# Altium PCB PCB.PcbDoc (part 1 of 2)
Units mm, origin at the board's own origin, x right, y up, seen from the top; angles counter-clockwise.
Board outline 100 x 110 mm, 6 copper layers (Top Layer, Inner Layer 2 (GND), Layer 3, Layer 4, Inner Layer 5 (GND), Bottom Layer 6), stack 1.597 mm thick; 88 components, 67 nets, 500 pads, 417 vias.
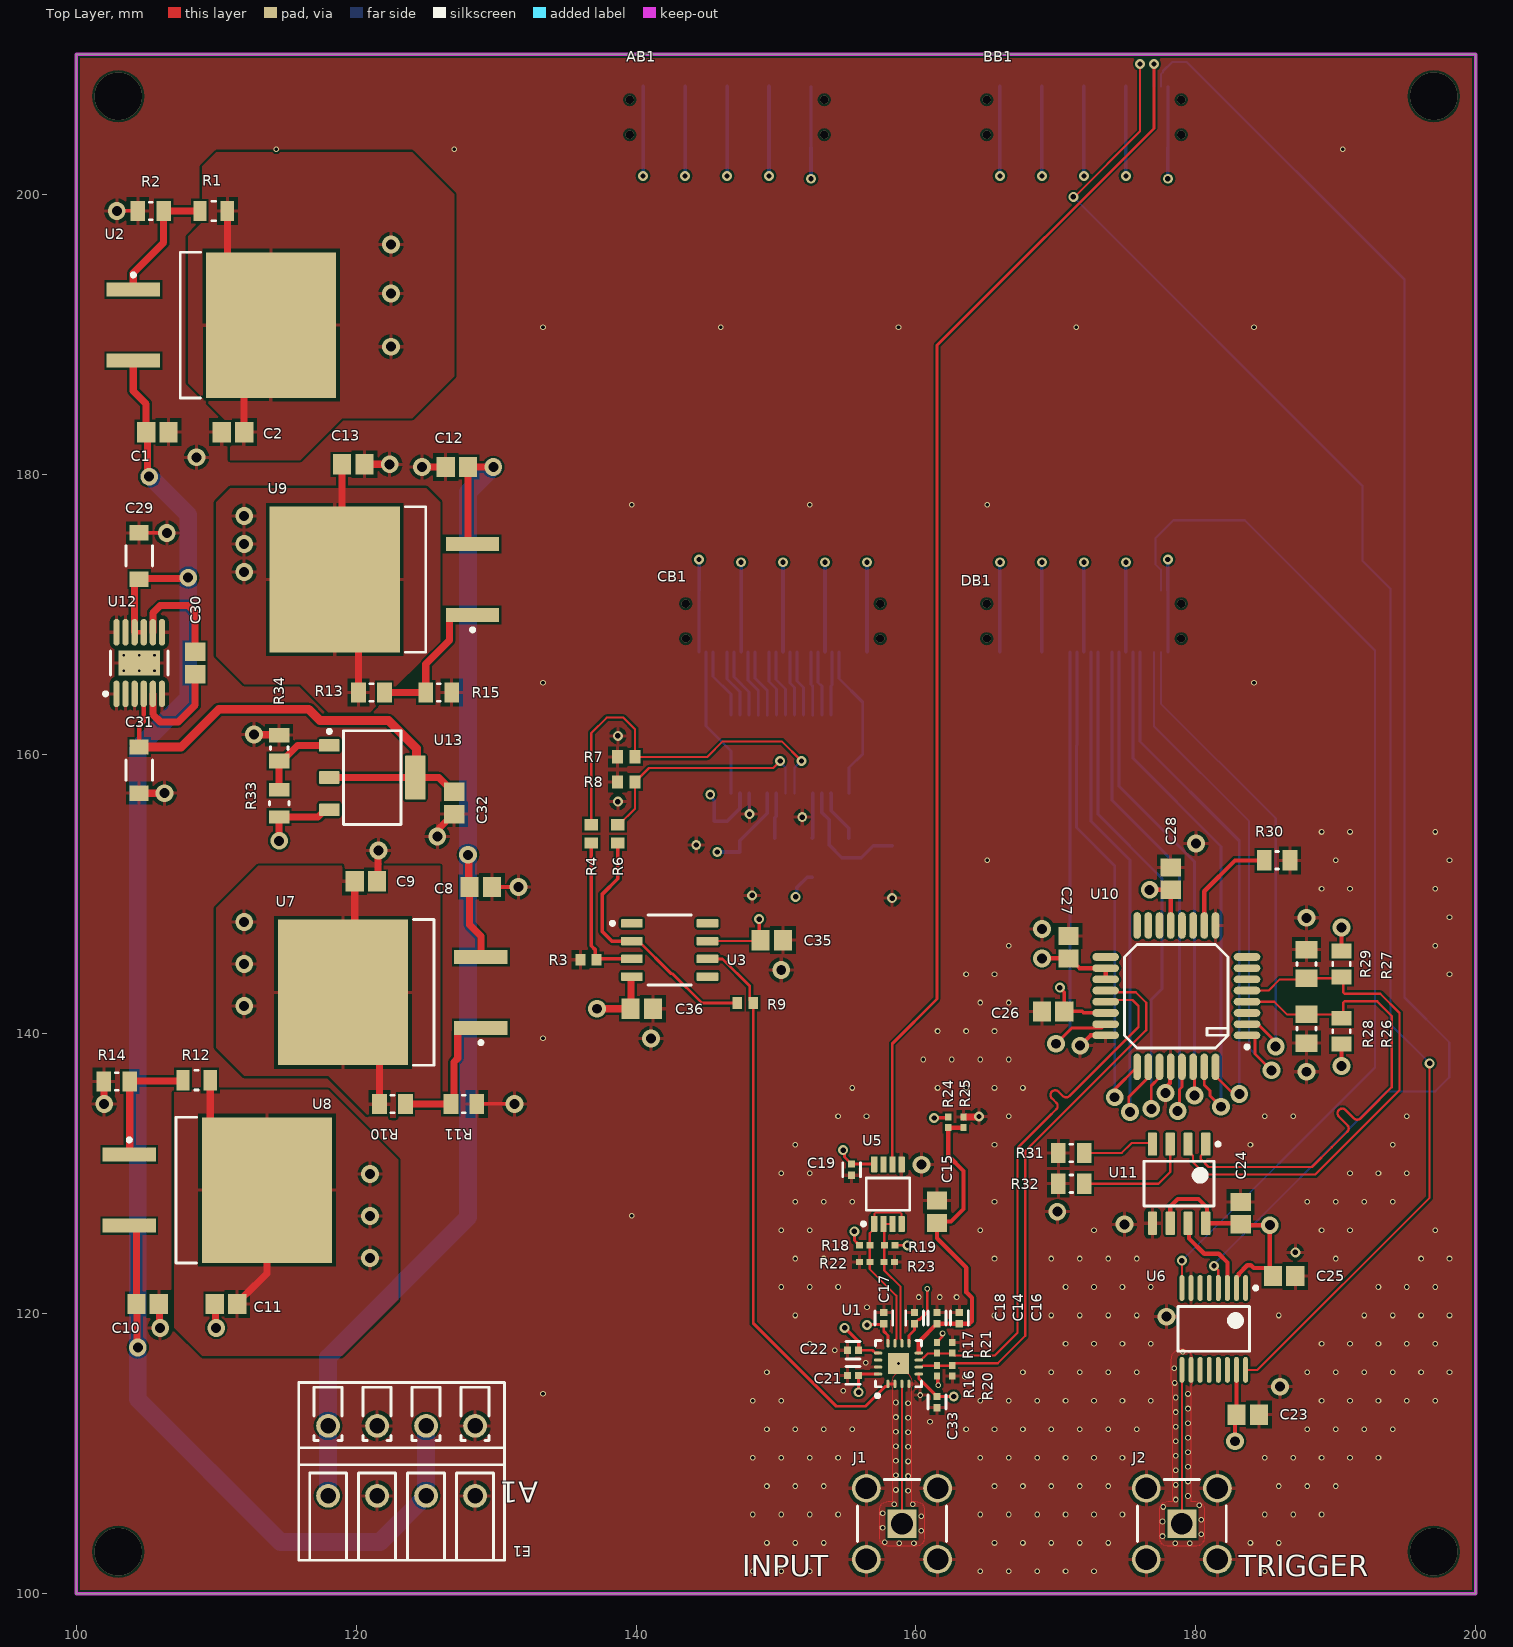
[diagram p0: Top Layer view]
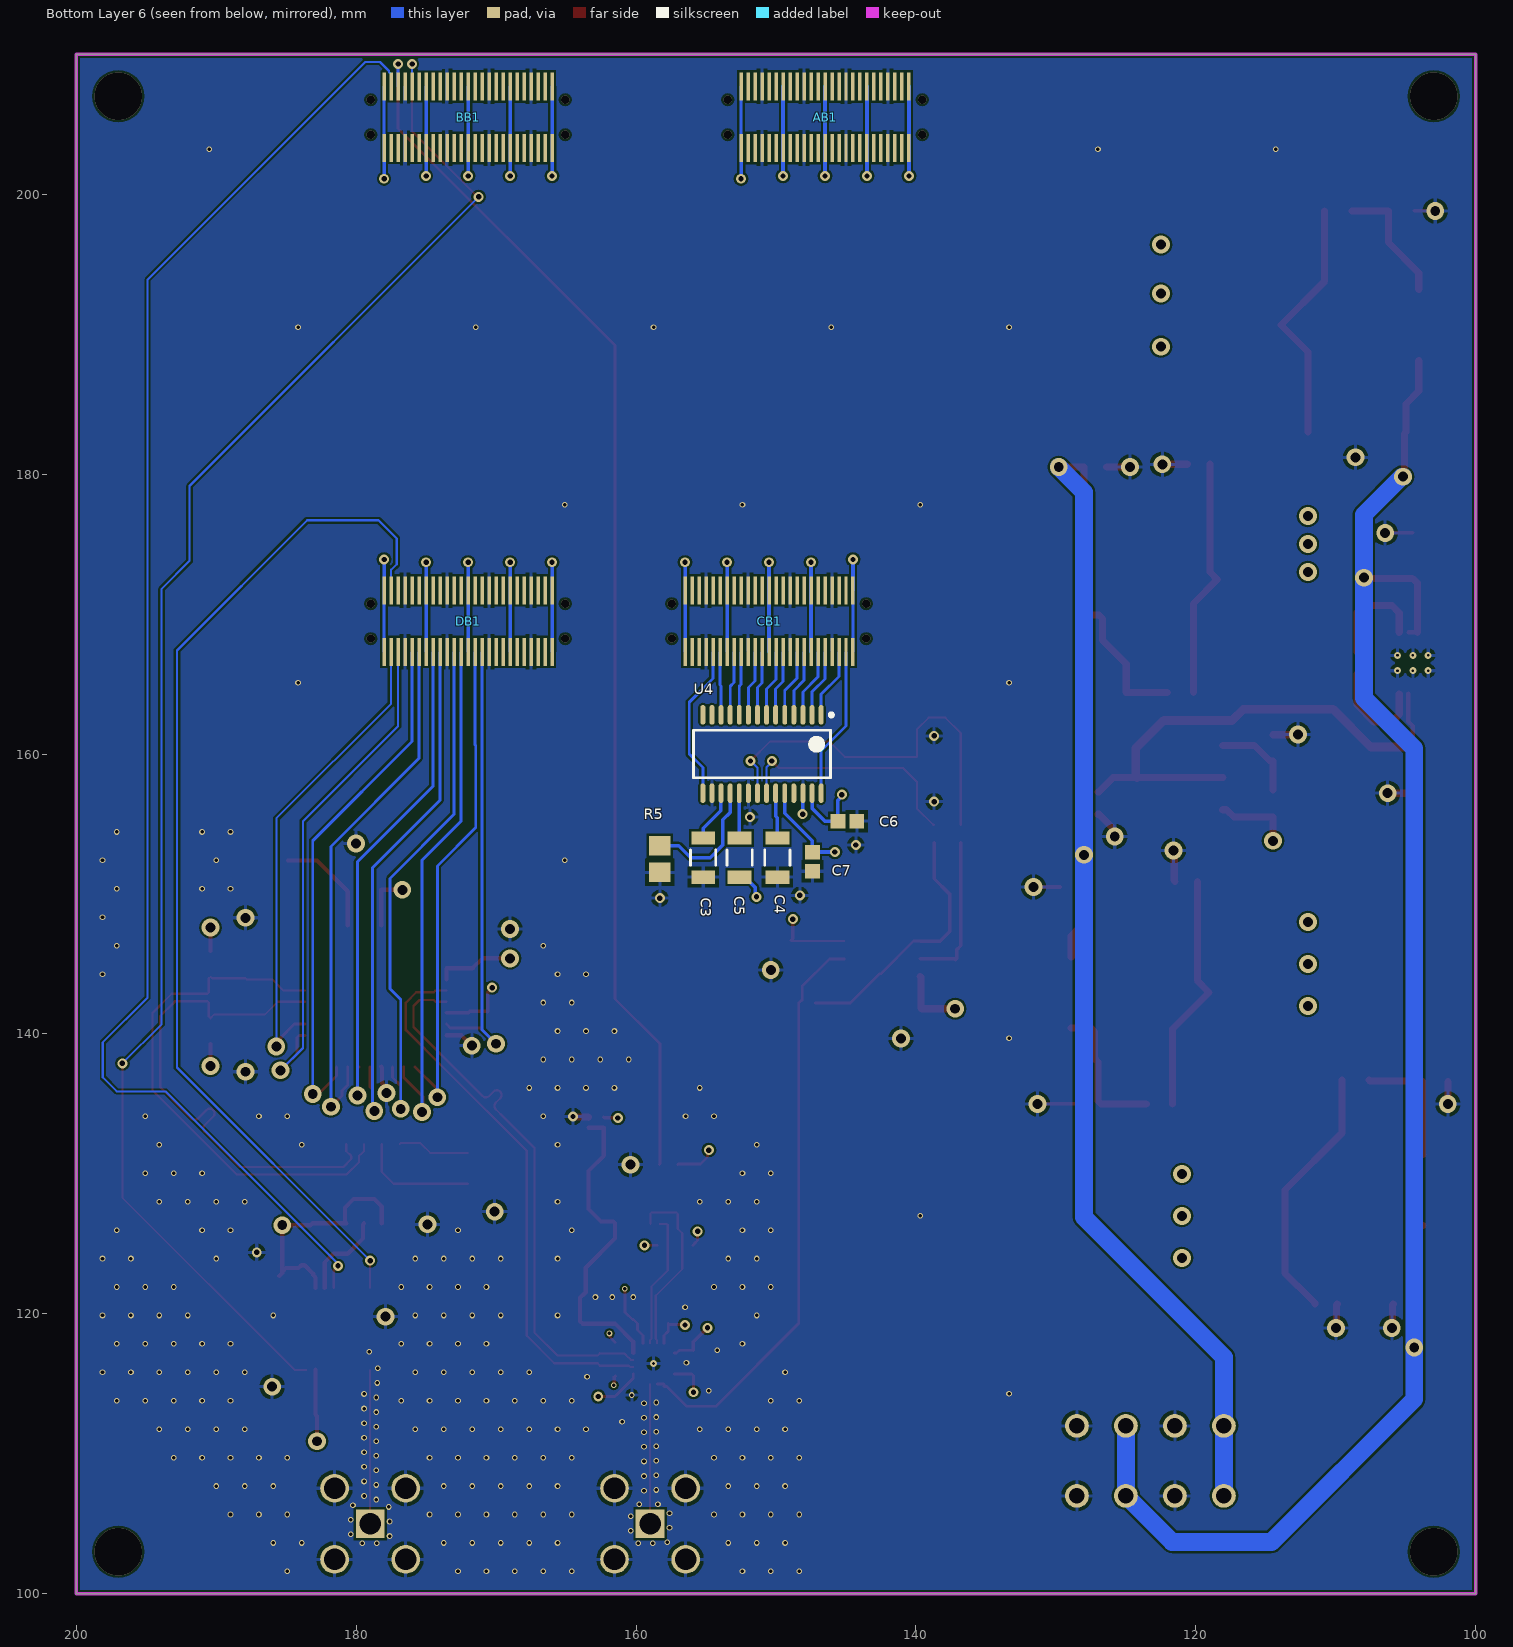
[diagram p1: Bottom Layer 6 view, seen from below]
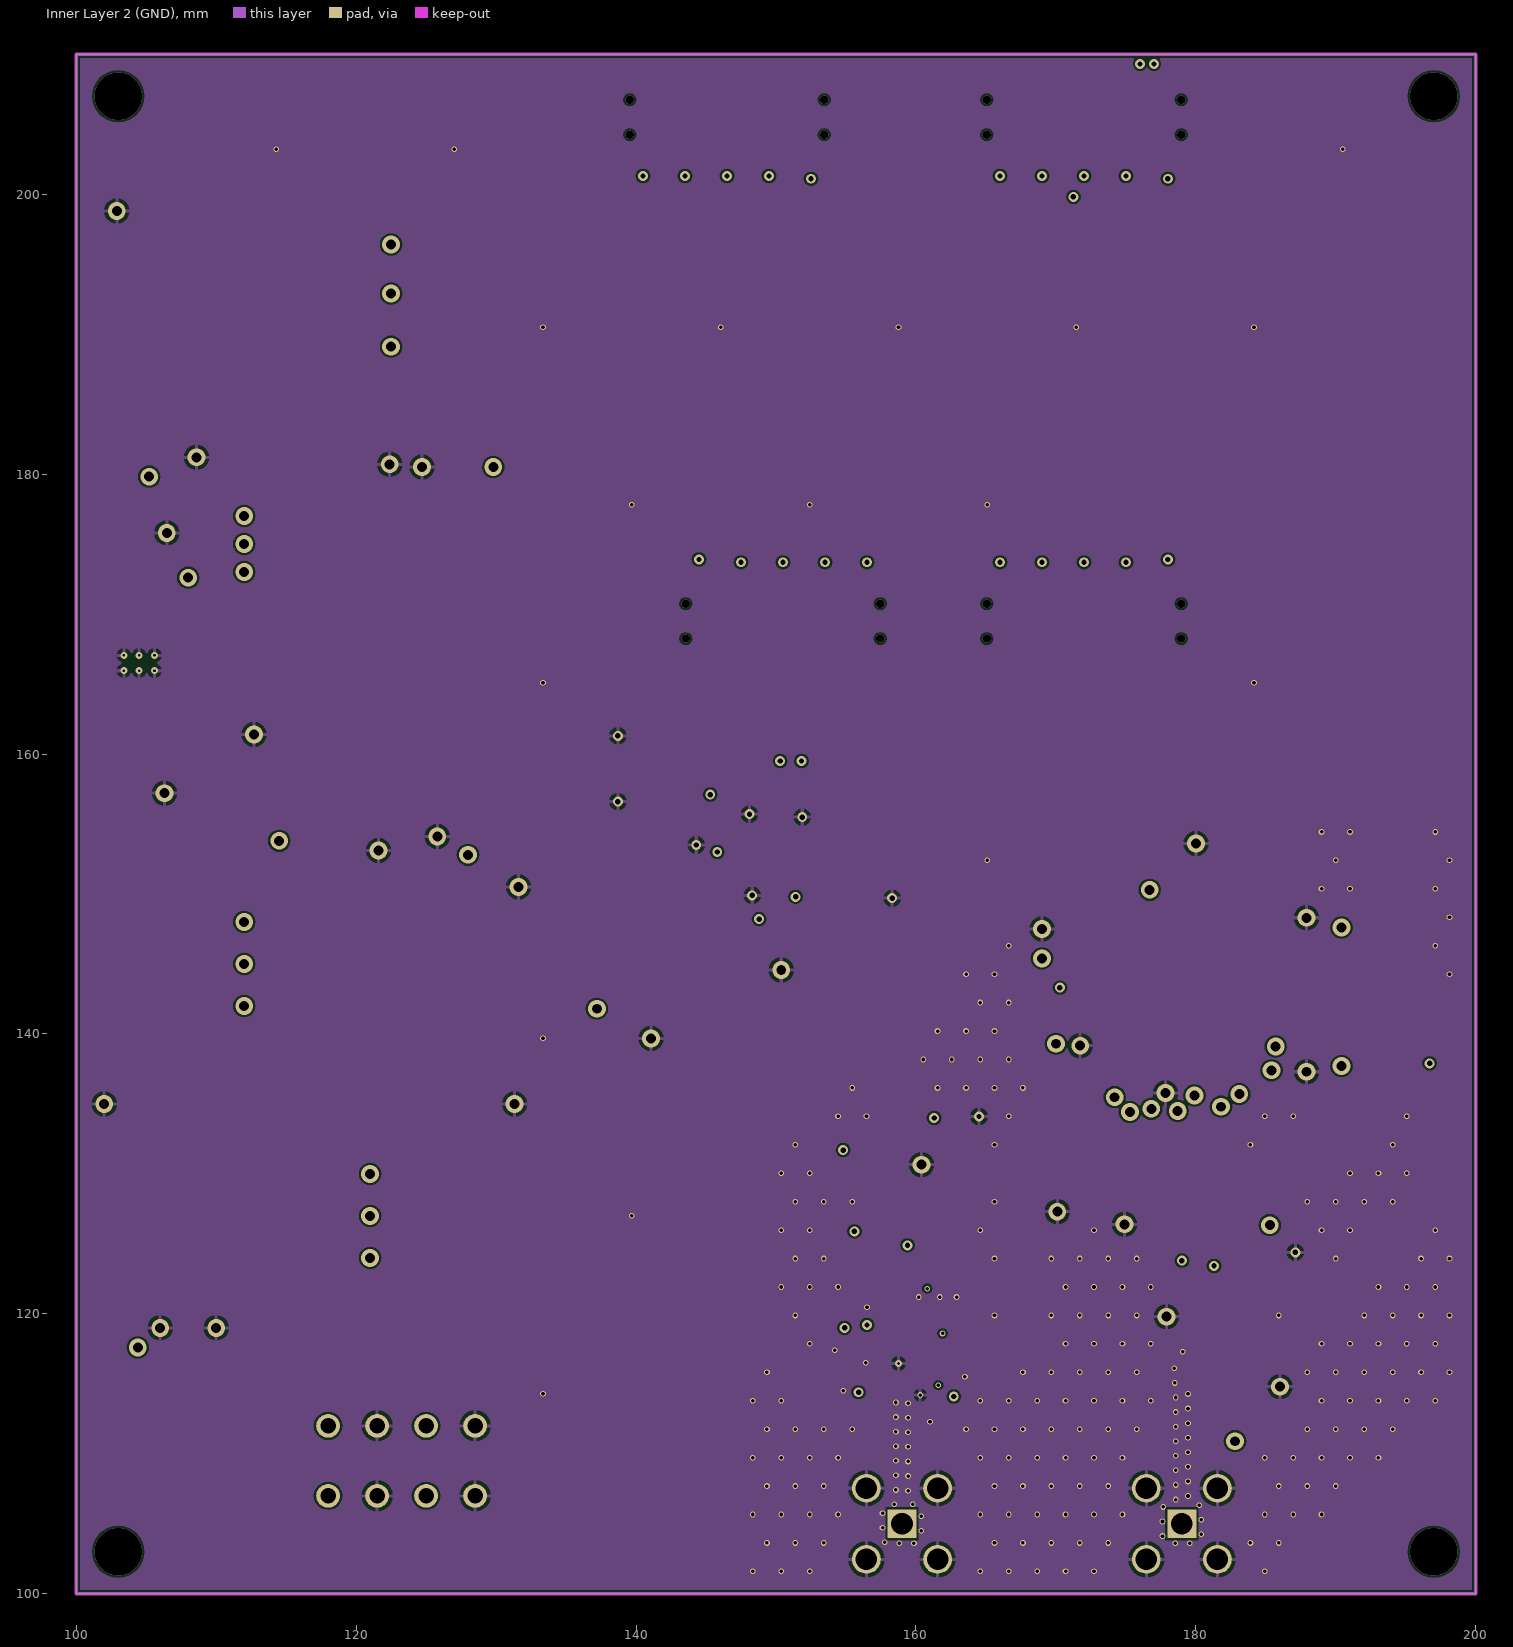
[diagram p2: Inner Layer 2 (GND)]
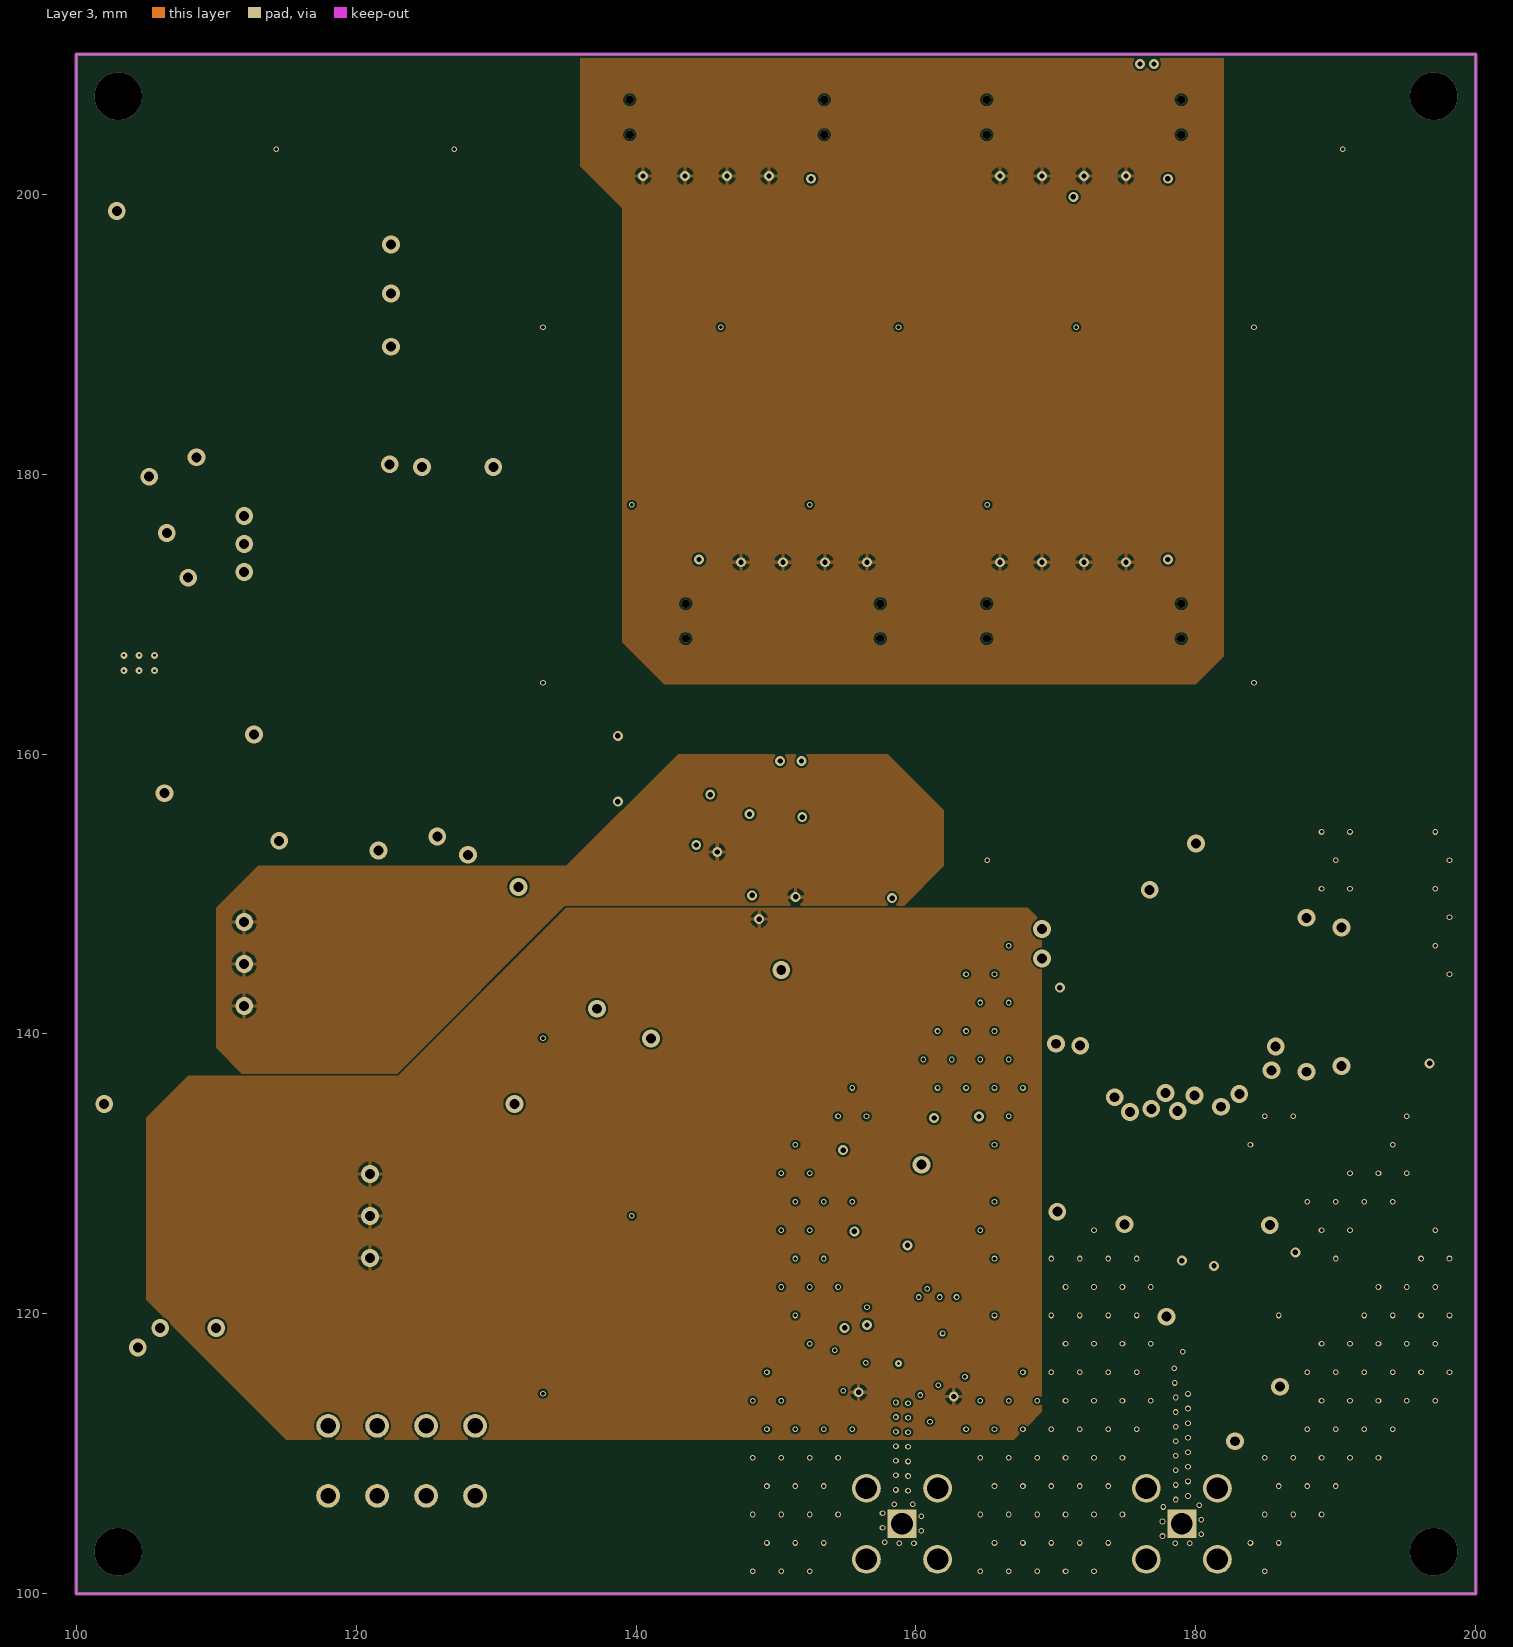
[diagram p3: Layer 3]
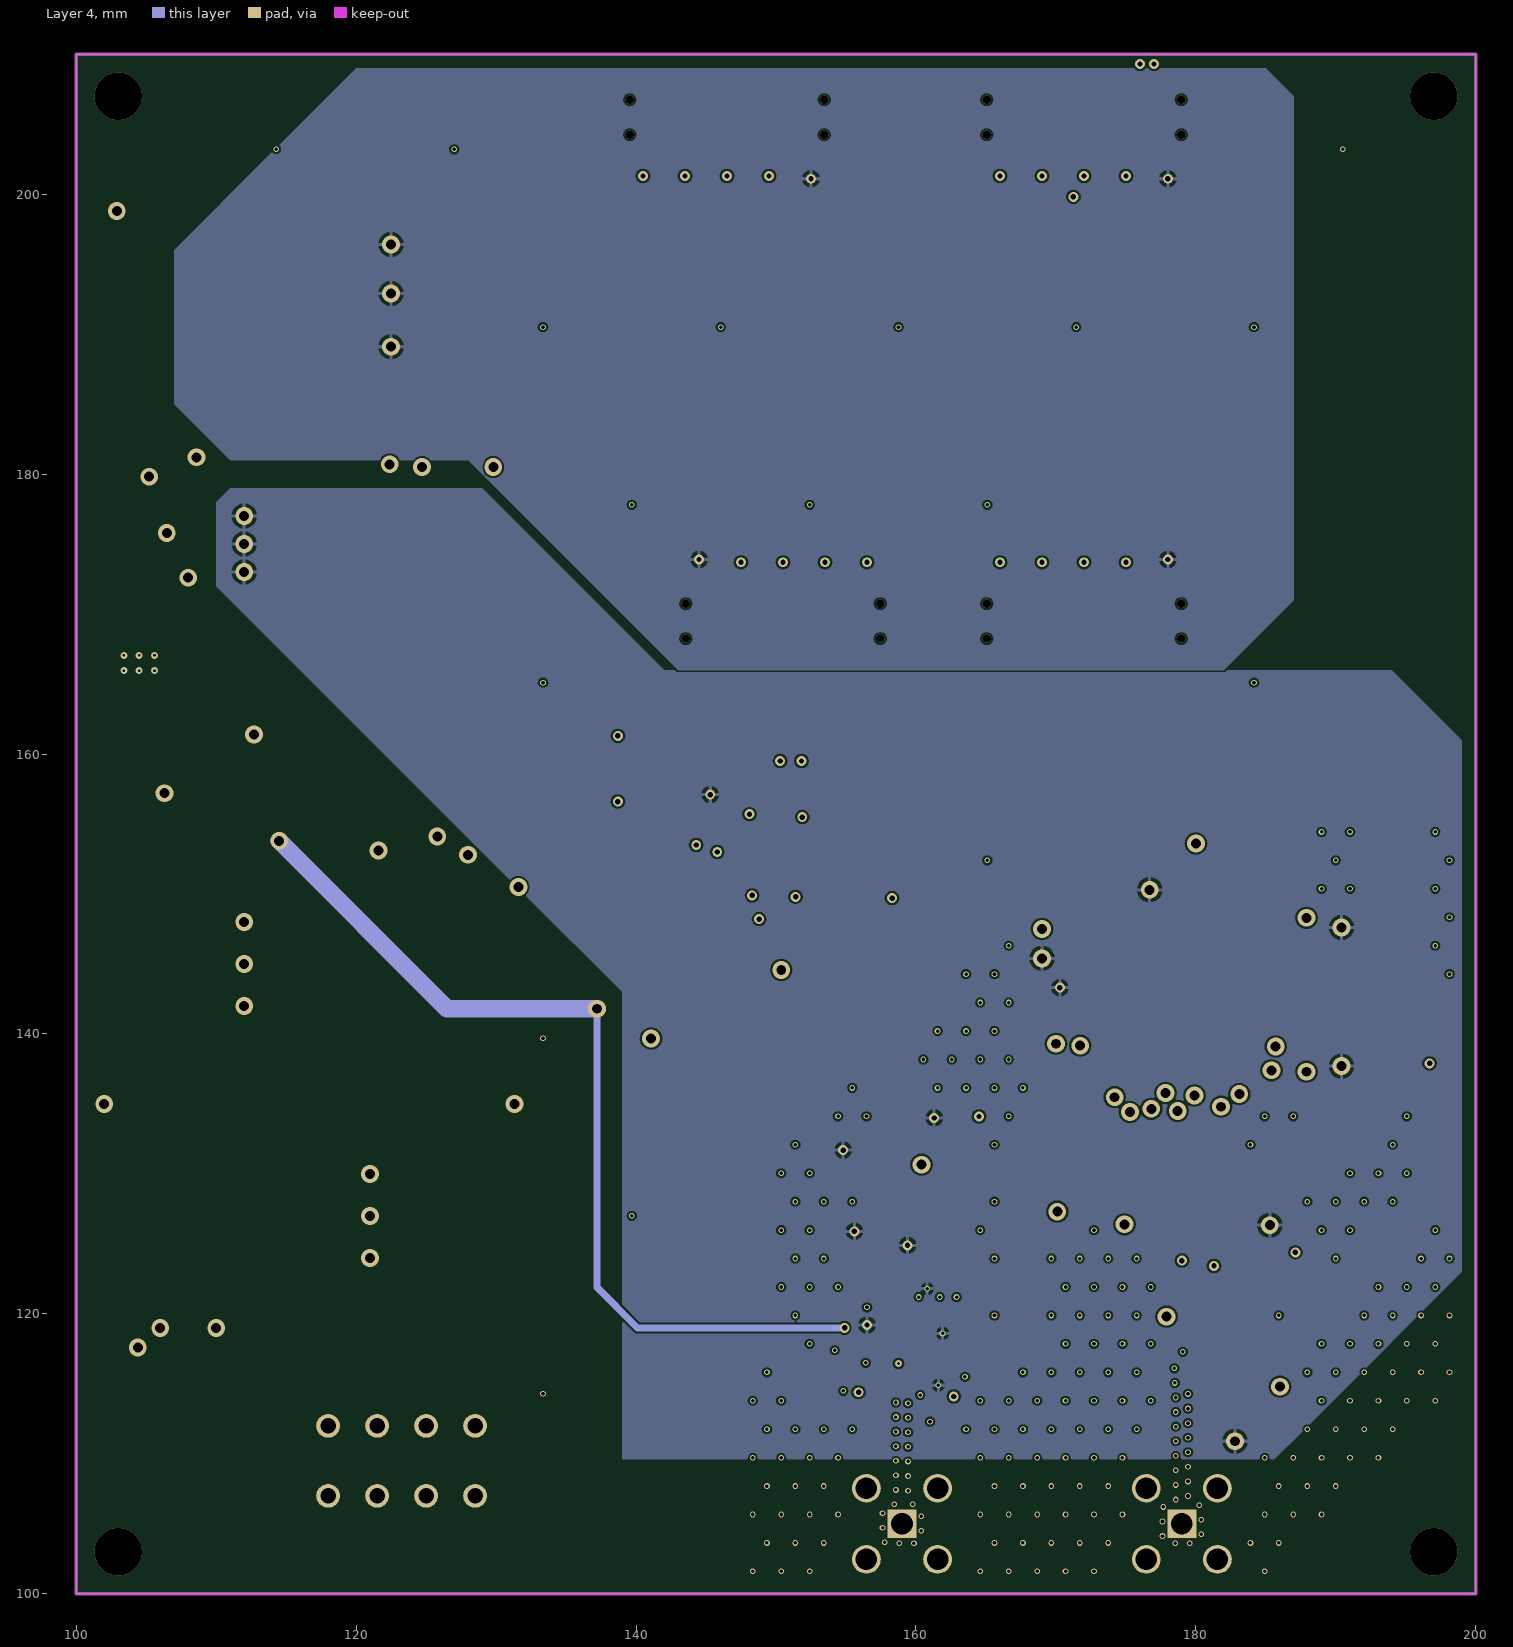
[diagram p4: Layer 4]
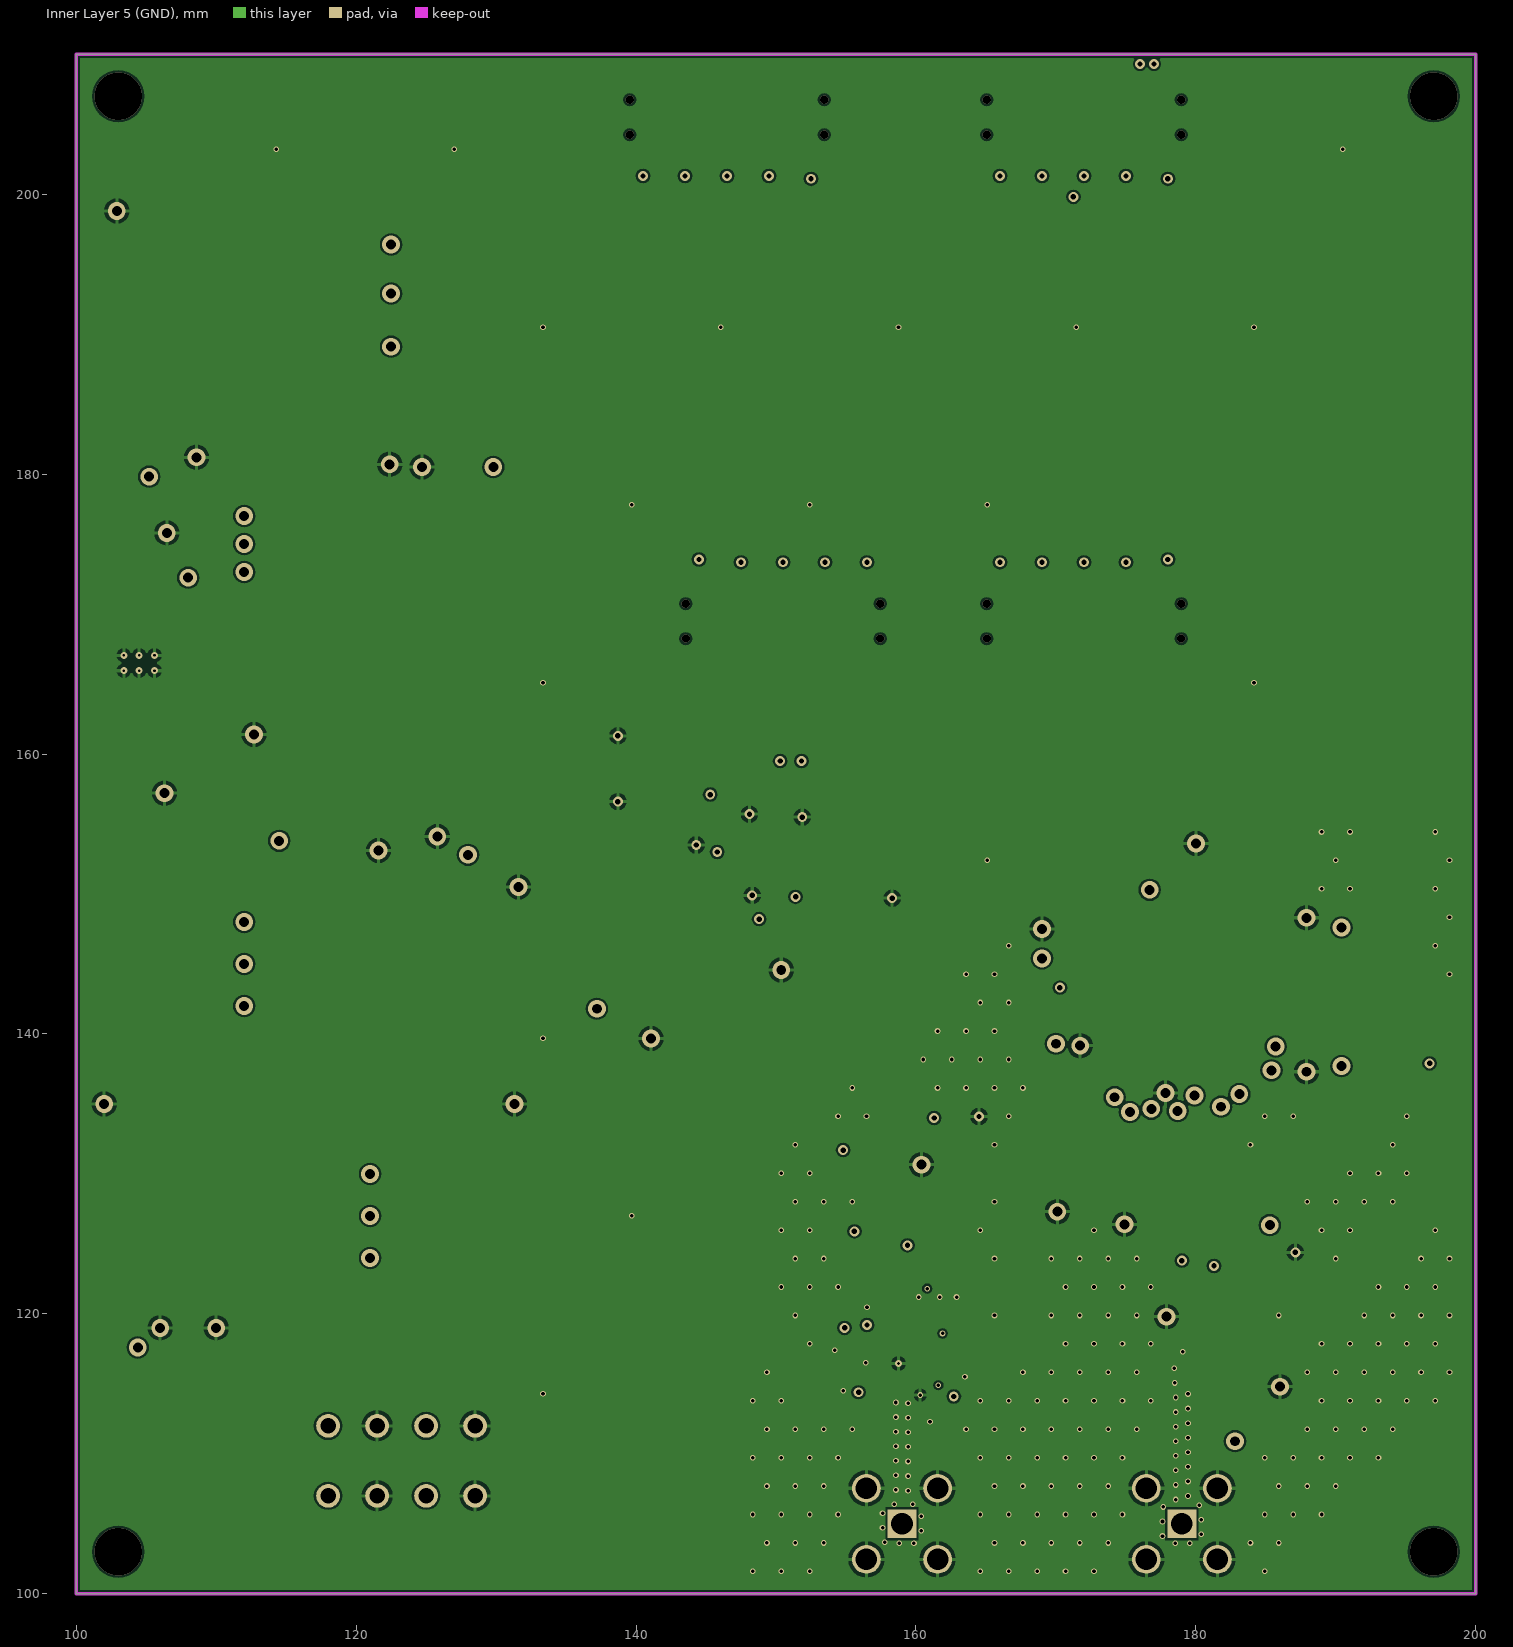
[diagram p5: Inner Layer 5 (GND)]
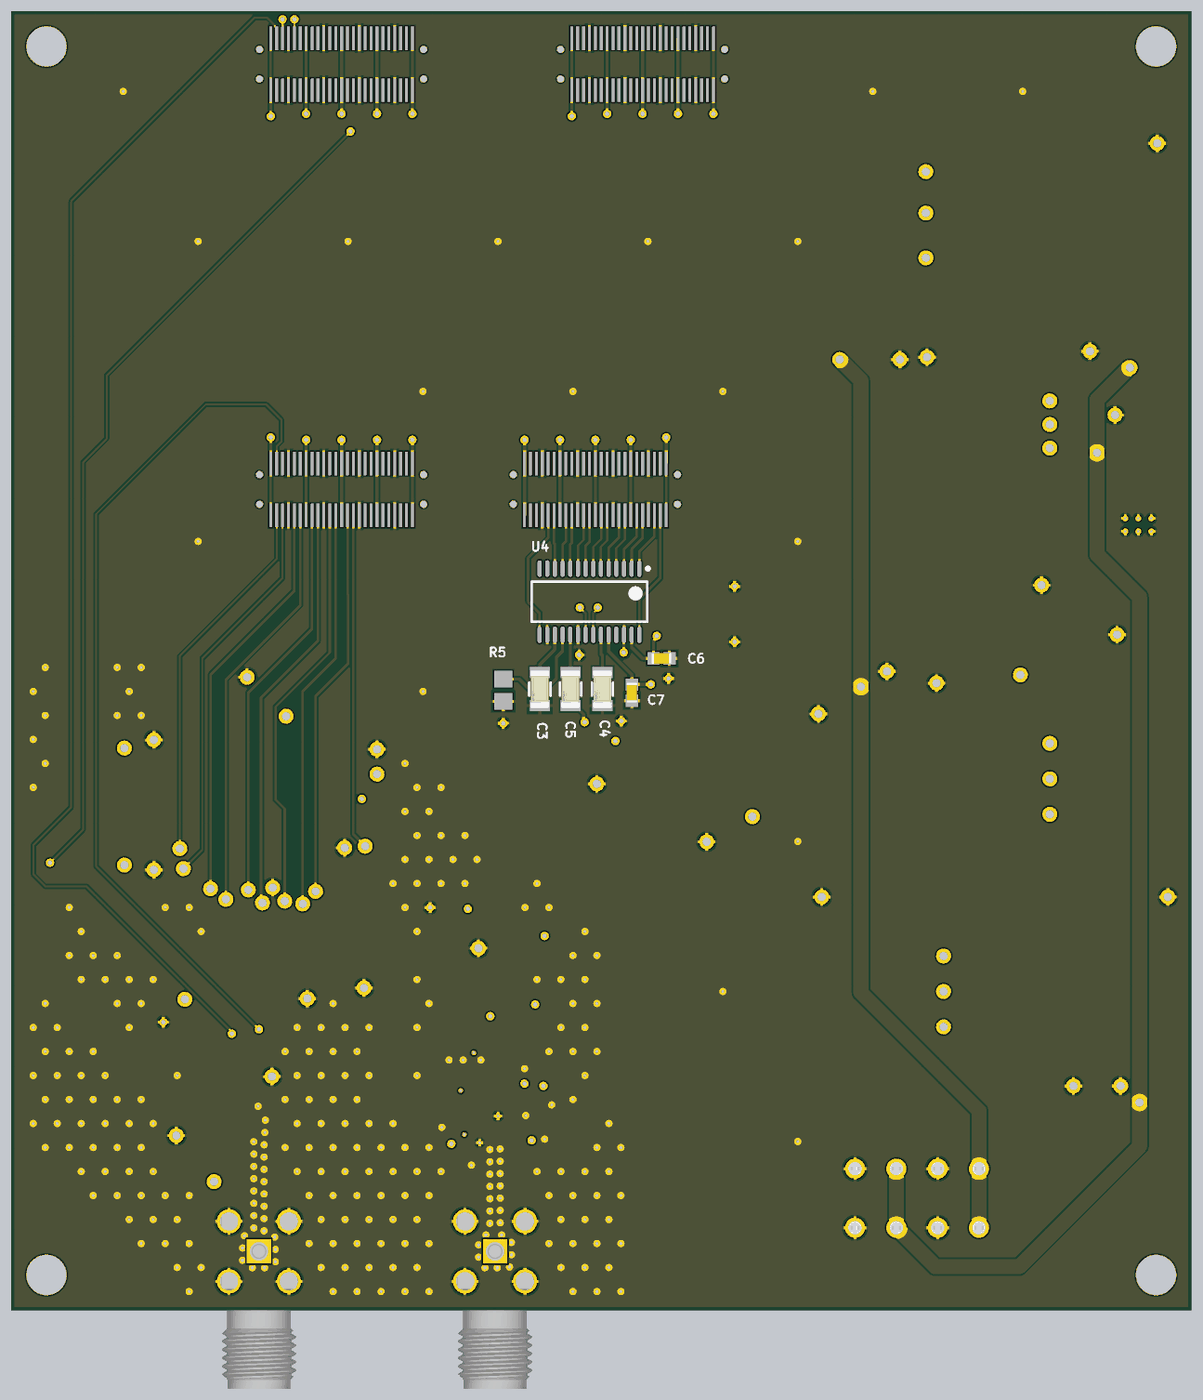
[diagram p7: 3D render of the assembled board from below, using the file's embedded part models]

## Layer stack, top to bottom
Top Solder: solder mask 0.0254, SM-001, Dk 4
Top Layer: signal copper 0.035
Dielectric 1: prepreg 0.1, PP-017, Dk 4.05
Inner Layer 2 (GND): signal copper 0.0175
Dielectric 6: core 0.565, Core-009, Dk 4.05
Layer 3: signal copper 0.0175
Dielectric 3: core 0.127, Core-039, Dk 4.05
Layer 4: signal copper 0.0175
Dielectric 7: core 0.565, Core-009, Dk 4.05
Inner Layer 5 (GND): signal copper 0.0175
Dielectric 5: prepreg 0.1, PP-017, Dk 4.05
Bottom Layer 6: signal copper 0.035
Bottom Solder: solder mask 0.0254, SM-001, Dk 4

## Board outline
100,100 200,100 200,210 100,210

## Design rules (kind name [scope] priority, off if disabled: settings)
Clearance [All] p1: gap=0.152 ignorepadtopadclearanceinfootprint=FALSE
DiffPairsRouting [All] p1: maxlimit=0.381 minlimit=0.381 mostfreqgap=0.381 toplayer_minwidth=0.164 toplayer_maxwidth=0.164 toplayer_prefwidth=0.164 midlayer1_minwidth=0.116 midlayer1_maxwidth=0.116 midlayer1_prefwidth=0.116 midlayer2_minwidth=0.116 midlayer2_maxwidth=0.116 midlayer2_prefwidth=0.116 midlayer3_minwidth=0.14 midlayer3_maxwidth=0.14 midlayer3_prefwidth=0.14 midlayer4_minwidth=0.14 midlayer4_maxwidth=0.14 midlayer4_prefwidth=0.14 bottomlayer_minwidth=0.164 bottomlayer_maxwidth=0.164 bottomlayer_prefwidth=0.164 impedanceprofiledriven=TRUE impedanceprofileid={3BFFB8C7-4477-42D9-B447-678A1F2A0C18} impedanceprofilevalue=100.000000 maxuncoupledlength=12.7
HoleSize [All] p1: absolutevalues=TRUE maxlimit=6.35 minlimit=0.025 maxpercent=80.000 minpercent=20.000
MatchedLengths [InDifferentialPairClass('All Differential Pairs')] p1: tolerance=0.254 checknetsindiffpair=TRUE checkdiffpairvsdiffpair=FALSE checkxsignals=FALSE checkothers=FALSE
MinimumSolderMaskSliver [All] p1 off: minsoldermaskwidth=0.127
PolygonConnect [All] p1: connectstyle=Relief reliefconductorwidth=0.254 reliefentries=4 polygonreliefangle="90 Angle" airgapwidth=0.254
RoomDefinition TR [InComponentClass('TR')] p1 off: confinementstyle=ConfineIn formatcopy=TRUE lockcomponents=FALSE outline 198.5,112 198.5,157 172,157 172,112
RoomDefinition IN [InComponentClass('IN')] p2 off: confinementstyle=ConfineIn formatcopy=TRUE lockcomponents=FALSE outline 139,111.4 164.5,111.4 164.5,128.5 139,128.5
RoomDefinition PW [InComponentClass('PW')] p3 off: confinementstyle=ConfineIn formatcopy=TRUE lockcomponents=FALSE outline 101.5,119.7 132,119.7 132,200.6 101.5,200.6
RoomDefinition FP [InComponentClass('FP')] p4 off: confinementstyle=ConfineIn formatcopy=TRUE lockcomponents=FALSE outline 135,164.5 192.5,164.5 192.5,210 135,210
RoomDefinition CV [InComponentClass('CV')] p5 off: confinementstyle=ConfineIn formatcopy=TRUE lockcomponents=FALSE outline 133.902,130 171,130 171,163.81 133.902,163.81
RoutingVias [All] p1: holewidth=0.711 width=1.27 viastyle="Through Hole" minholewidth=0.203 minwidth=0.381 maxholewidth=2.54 maxwidth=3.81
SilkToSilkClearance [All] p1: silktosilkclearance=0.102
SilkToSolderMaskClearance [IsPad] p1: minsilkscreentomaskgap=0.102 clearancetoexposedcopper=TRUE
SolderMaskExpansion [All] p1: expansion=0.102 istentingtop=FALSE
Width "Width SC50" [InNetClass('SC50')] p1: maxlimit=0.14 minlimit=0.116 preferedwidth=0.14 toplayer_minwidth=0.132 toplayer_maxwidth=0.132 toplayer_prefwidth=0.132 midlayer1_maxwidth=0.116 midlayer1_prefwidth=0.116 midlayer2_maxwidth=0.116 midlayer2_prefwidth=0.116 midlayer3_minwidth=0.14 midlayer4_minwidth=0.14 bottomlayer_minwidth=0.132 bottomlayer_maxwidth=0.132 bottomlayer_prefwidth=0.132 impedanceprofiledriven=TRUE impedanceprofileid={77652154-0B8B-401F-A88F-FA008ABDF14B} impedanceprofilevalue=50.000000 minimp=50.000000 maximp=50.000000 favimp=50.000000
Width "Width Diff50" [InNetClass('S50')] p2: maxlimit=0.17 minlimit=0.133 preferedwidth=0.17 toplayer_minwidth=0.158 toplayer_maxwidth=0.158 toplayer_prefwidth=0.158 midlayer1_maxwidth=0.133 midlayer1_prefwidth=0.133 midlayer2_maxwidth=0.133 midlayer2_prefwidth=0.133 midlayer3_minwidth=0.17 midlayer4_minwidth=0.17 bottomlayer_minwidth=0.158 bottomlayer_maxwidth=0.158 bottomlayer_prefwidth=0.158 impedanceprofiledriven=TRUE impedanceprofileid={6097593C-2317-40E9-9803-30C48A11CF6E} impedanceprofilevalue=50.000000 minimp=50.000000 maximp=50.000000 favimp=50.000000
Width [All] p3: maxlimit=6.35 minlimit=0.152 preferedwidth=0.254
25 further rules are at their usual default settings.

## Classes and differential pairs
net class S50: Latch-Enable_N Latch-Enable_P TRIGGER_DIFF_N TRIGGER_DIFF_P
net class SC50: NetJ1_1 NetJ2_1
component class TR: C23 C24 C25 C26 C27 C28 R26 R27 R28 R29 R30 R31 R32 U6 U10 U11
component class CN: E1 J1 J2
component class PW: C1 C2 C8 C9 C10 C11 C12 C13 C29 C30 C31 C32 R1 R2 R10 R11 R12 R13 R14 R15 R33 R34 U2 U7 U8 U9 U12 U13
component class IN: C14 C15 C16 C17 C18 C19 C21 C22 C33 R16 R17 R18 R19 R20 R21 R22 R23 R24 R25 U1 U5
component class FP: AB1 BB1 CB1 DB1
component class CV: C3 C4 C5 C6 C7 C35 C36 R3 R4 R5 R6 R7 R8 R9 U3 U4
differential pair TRIGGER_DIFF: +TRIGGER_DIFF_P -TRIGGER_DIFF_N
differential pair Latch-Enable: +Latch-Enable_P -Latch-Enable_N

## Components (designator, comment, footprint, x,y, rotation, side; value= is the part's Value field where it differs from the comment)
AB1 "4UCON 19008" 4UCON_19008 146.5,205.5 r180 top locked
BB1 "4UCON 19008" 4UCON_19008 172,205.5 r180 top locked
C1 "1uF" CAPC2013X100X50NL20T25 105.8,183 r180 top
C2 "1uF" CAPC2013X100X50NL20T25 111.2,183 r0 top
C3 "C1206C104J3GACTU" FP-C1206C-EB-MFG 155.2,152.6 r90 bottom value="0.10 μF"
C4 "C1206C104J3GACTU" FP-C1206C-EB-MFG 149.9,152.6 r90 bottom value="0.10 μF"
C5 "C1206C104J3GACTU" FP-C1206C-EB-MFG 152.6,152.6 r90 bottom value="0.10 μF"
C6 "CC0603KRX7R9BB104" CAPC1608X90X40ML10T20 144.9,155.2 r0 bottom
C7 "CC0603KRX7R9BB104" CAPC1608X90X40ML10T20 147.4,152.3 r90 bottom
C8 "1uF" CAPC2013X100X50NL20T25 128.9,150.5 r180 top
C9 "1uF" CAPC2013X100X50NL20T25 120.7,150.9 r180 top
C10 "1uF" CAPC2013X100X50NL20T25 105.1,120.7 r180 top
C11 "1uF" CAPC2013X100X50NL20T25 110.7,120.7 r0 top
C12 "1uF" CAPC2013X100X50NL20T25 127.2,180.5 r0 top
C13 "1uF" CAPC2013X100X50NL20T25 119.8,180.7 r180 top
C14 "C0402C104K8PACTU" FP-C0402-BB-MFG 161.5,119.7 r90 top value="0.10 μF"
C15 "1uF" CAPC2013X100X50NL20T25 161.5,127.3 r270 top
C16 "C0402C104K8PACTU" FP-C0402-BB-MFG 163.1,119.7 r90 top value="0.10 μF"
C17 "C0402C104K8PACTU" FP-C0402-BB-MFG 157.7,119.7 r90 top value="0.10 μF"
C18 "C0402C104K8PACTU" FP-C0402-BB-MFG 159.9,119.7 r90 top value="0.10 μF"
C19 "C0402C104K8PACTU" FP-C0402-BB-MFG 155.4,130.3 r270 top value="0.10 μF"
C21 "C0402C104K8PACTU" FP-C0402-BB-MFG 155.5,115.6 r180 top value="0.10 μF"
C22 "C0402C104K8PACTU" FP-C0402-BB-MFG 155.5,117.4 r0 top value="0.10 μF"
C23 "C0805C104K5RACTU" CAPC2013X88X50NL20T25 183.7,112.8 r180 top value=100n
C24 "C0805C104K5RACTU" CAPC2013X88X50NL20T25 183.2,127.2 r270 top value=100n
C25 "C0805C104K5RACTU" CAPC2013X88X50NL20T25 186.3,122.7 r180 top value=100n
C26 "C0805C104K5RACTU" CAPC2013X88X50NL20T25 169.8,141.6 r0 top value=100n
C27 "C0805C104K5RACTU" CAPC2013X88X50NL20T25 170.9,146.2 r270 top value=100n
C28 "C0805C104K5RACTU" CAPC2013X88X50NL20T25 178.2,151.1 r270 top value=100n
C29 "CGA5L1X7R1E106K160AC" FP-CGA5L-0_3-0_1-MFG 104.5,174.15 r90 top
C30 "1uF" CAPC2013X100X50NL20T25 108.5,166.5 r90 top
C31 "CGA5L1X7R1E106K160AC" FP-CGA5L-0_3-0_1-MFG 104.5,158.85 r270 top
C32 "1uF" CAPC2013X100X50NL20T25 127,156.5 r90 top
C33 "C0402C104K8PACTU" FP-C0402-BB-MFG 161.5,113.7 r270 top value="0.10 μF"
C35 "C0805C104K5RACTU" CAPC2013X88X50NL20T25 149.7,146.7 r180 top value=100n
C36 "C0805C104K5RACTU" CAPC2013X88X50NL20T25 140.4,141.8 r180 top value=100n
CB1 "4UCON 19008" 4UCON_19008 150.5,169.5 r0 top locked
DB1 "4UCON 19008" 4UCON_19008 172,169.5 r180 top locked
E1 "1885200000" LSF_SMT_3_5_135_04 123.25,108.75 r180 top
J1 "INPUT" MOLX-731000114_V 159,105 r90 top locked
J2 "TRIGGER" MOLX-731000114_V 179,105 r90 top locked
R1 "CRCW080530K0FKEA" FP-CRCW0805-e3-MFG 109.825,198.8 r180 top
R2 "CRCW080510K0FKEA" RESC2013X50X30NL20T20 105.325,198.8 r180 top
R3 "20k" RESC1609X50X30LL10T20 136.6,145.3 r180 top
R4 "10k" RESC1609X50X30NL8T20 136.8,154.3 r270 top
R5 "ERA6AEB202V" RESC2013X60X40ML20T25 158.3,152.5 r270 bottom
R6 "10k" RESC1609X50X30NL8T20 138.7,154.3 r270 top
R7 "CRCW060350R0FKEA" RESC1609X50X30NL10T20 139.3,159.8 r0 top
R8 "CRCW060350R0FKEA" RESC1609X50X30NL10T20 139.3,158 r0 top
R9 "20k" RESC1609X50X30LL10T20 147.8,142.2 r0 top
R10 "CRCW080518K0FKEA" RESC2013X50X30NL20T20 122.6,135 r180 top
R11 "CRCW080511K0FKEA" RESC2013X50X30NL20T20 127.7,135 r180 top
R12 "CRCW080530K0FKEA" FP-CRCW0805-e3-MFG 108.6,136.7 r180 top
R13 "CRCW080518K0FKEA" RESC2013X50X30NL20T20 121.1,164.4 r180 top
R14 "CRCW080510K0FKEA" RESC2013X50X30NL20T20 102.9,136.6 r180 top
R15 "CRCW080511K0FKEA" RESC2013X50X30NL20T20 125.9,164.4 r180 top
R16 "RC0402FR-07127RL" RESC1005X40X25LL05T10 161.498,115.923 r270 top value=127R
R17 "RC0402FR-07127RL" RESC1005X40X25LL05T10 161.5,117.575 r90 top value=127R
R18 "RC0402FR-07127RL" RESC1005X40X25LL05T10 156.325,124.9 r180 top value=127R
R19 "RC0402FR-07127RL" RESC1005X40X25LL05T10 158.11,124.9 r0 top value=127R
R20 "RC0402FR-0782R5L" RESC1005X40X25LL05T10 162.598,115.923 r90 top value=82R5
R21 "RC0402FR-0782R5L" RESC1005X40X25LL05T10 162.6,117.575 r270 top value=82R5
R22 "RC0402FR-0782R5L" RESC1005X40X25LL05T10 156.325,123.7 r0 top value=82R5
R23 "RC0402FR-0782R5L" RESC1005X40X25LL05T10 158.075,123.7 r180 top value=82R5
R24 "RC0402FR-07127RL" RESC1005X40X25LL05T10 162.3,133.675 r90 top value=127R
R25 "RC0402FR-0782R5L" RESC1005X40X25LL05T10 163.4,133.675 r270 top value=82R5
R26 "127 Ohm" RESC2013X50X30NL20T20 190.4,140.2 r270 top
R27 "127 Ohm" RESC2013X50X30NL20T20 190.4,145 r90 top
R28 "82.5 Ohm" RESC2013X50X30ML20T20 187.9,140.375 r90 top
R29 "82.5 Ohm" RESC2013X50X30ML20T20 187.9,145 r270 top
R30 "2.2k" RESC2013X50X30NL20T20 185.8,152.4 r180 top
R31 "2.2k" RESC2013X50X30NL20T20 171.1,131.5 r180 top
R32 "2.2k" RESC2013X50X30NL20T20 171.1,129.3 r180 top
R33 "CRCW080530K0FKEA" FP-CRCW0805-e3-MFG 114.5,156.475 r90 top
R34 "CRCW080510K0FKEA" RESC2013X50X30NL20T20 114.5,160.425 r90 top
U1 "ADCMP582BCPZ-R2" ADI-CP-16-3_L 158.75,116.45 r90 top locked
U2 "LM317D2T-TR" TO-263_N 110.379,190.644 r0 top
U3 "OPA189IDR" FP-D0008A-MFG 142.4,146 r0 top
U4 "AD9762ARUZ" RU-28_L 151,160 r270 bottom
U5 "SN65EPT23DGKR" DGK0008A_L 158,128.556 r90 top
U6 "Si53360-B-GT" SLAB-TSSOP-16_M 181.275,118.925 r270 top
U7 "LM317D2T-TR" TO-263_N 122.61,142.967 r180 top
U8 "LM317D2T-TR" TO-263_N 110.09,128.844 r0 top
U9 "LM317D2T-TR" TO-263_N 122.021,172.467 r180 top
U10 "Variable Digital Delay" CQFP80P1115X1115X120-32N 178.6,142.7 r180 top
U11 "SN65EPT22D" D0008A_M 178.8,129.3 r270 top
U12 "LTC3261IMSE#PBF" LT-MSE-12-EDP_M 104.5,166.5 r90 top
U13 "LM337IMP/NOPB" DCY0004A_L 121.156,158.32 r0 top

## Footprints (in the part's own frame and the unit in brackets; to place one, negate y for a bottom-side part, rotate by r counter-clockwise, add the part's x,y. Pads: shape width x height; smd on the part's side, far side on the other; paste and mask are expansions set on the pad)
4UCON_19008 [mm]
  rect 0.25x2 smd far side: 1(-6,-2.2) 2(-5.5,-2.2) 3(-5,-2.2) 4(-4.5,-2.2) 5(-4,-2.2) 6(-3.5,-2.2) 7(-3,-2.2) 8(-2.5,-2.2) 9(-2,-2.2) 10(-1.5,-2.2) 11(-1,-2.2) 12(-0.5,-2.2) 13(0,-2.2) 14(0.5,-2.2) 15(1,-2.2) 16(1.5,-2.2) 17(2,-2.2) 18(2.5,-2.2) 19(3,-2.2) 20(3.5,-2.2) 21(4,-2.2) 22(4.5,-2.2) 23(5,-2.2) 24(5.5,-2.2) 25(6,-2.2) 26(6,2.2) 27(5.5,2.2) 28(5,2.2) 29(4.5,2.2) 30(4,2.2) 31(3.5,2.2) 32(3,2.2) 33(2.5,2.2) 34(2,2.2) 35(1.5,2.2) 36(1,2.2) 37(0.5,2.2) 38(0,2.2) 39(-0.5,2.2) 40(-1,2.2) 41(-1.5,2.2) 42(-2,2.2) 43(-2.5,2.2) 44(-3,2.2) 45(-3.5,2.2) 46(-4,2.2) 47(-4.5,2.2) 48(-5,2.2) 49(-5.5,2.2) 50(-6,2.2)
ADI-CP-16-3_L [mm] "QFN, 16-Leads, Body 3x3mm, Pitch 0.5mm, Thermal Pad 1.5x1.5mm, IPC High Density"
  oval 0.6x0.2 smd: 1(-1.45,0.75) 2(-1.45,0.25) 3(-1.45,-0.25) 4(-1.45,-0.75) 9(1.45,-0.75) 10(1.45,-0.25) 11(1.45,0.25) 12(1.45,0.75)
  oval 0.2x0.6 smd: 5(-0.75,-1.45) 6(-0.25,-1.45) 7(0.25,-1.45) 8(0.75,-1.45) 13(0.75,1.45) 14(0.25,1.45) 15(-0.25,1.45) 16(-0.75,1.45)
  rect 1.5x1.5 smd: 17(0,0)
  silkscreen extent -2.42,-1.65 1.65,1.65, body extent -1.5,-1.5 1.5,1.5, height 0.9
CAPC1608X90X40ML10T20 [mm] "Chip Capacitor, 2-Leads, Body 1.7x0.9mm, IPC Low Density"
  rect 1.05x1.05 smd: 1(-0.675,0) 2(0.675,0)
  body extent -0.85,-0.45 0.85,0.45, height 0.9
CAPC2013X88X50NL20T25 [mm] "Chip Capacitor, 2-Leads, Body 2.00x1.25mm, IPC Medium Density"
  rect 1.3x1.45 smd: 1(-0.8,0) 2(0.8,0)
  body extent -1.1,-0.72 1.1,0.72, height 0.88
CAPC2013X100X50NL20T25 [mm] "Chip Capacitor, 2-Leads, Body 2.00x1.25mm, IPC Medium Density"
  rect 1.3x1.45 smd: 1(-0.8,0) 2(0.8,0)
  body extent -1.1,-0.72 1.1,0.72, height 1
CQFP80P1115X1115X120-32N [mm] "CQFP, 32-Leads, Body 11.15x11.15mm, Pitch 0.80mm, IPC Medium Density"
  oval 1.9x0.55 smd: 1(-5.05,2.8) 2(-5.05,2) 3(-5.05,1.2) 4(-5.05,0.4) 5(-5.05,-0.4) 6(-5.05,-1.2) 7(-5.05,-2) 8(-5.05,-2.8) 17(5.05,-2.8) 18(5.05,-2) 19(5.05,-1.2) 20(5.05,-0.4) 21(5.05,0.4) 22(5.05,1.2) 23(5.05,2) 24(5.05,2.8)
  oval 0.55x1.9 smd: 9(-2.8,-5.05) 10(-2,-5.05) 11(-1.2,-5.05) 12(-0.4,-5.05) 13(0.4,-5.05) 14(1.2,-5.05) 15(2,-5.05) 16(2.8,-5.05) 25(2.8,5.05) 26(2,5.05) 27(1.2,5.05) 28(0.4,5.05) 29(-0.4,5.05) 30(-1.2,5.05) 31(-2,5.05) 32(-2.8,5.05)
  silkscreen extent -5.18,-3.7 3.7,3.75, body extent -5.58,-5.58 5.58,5.58, height 1.1
D0008A_M [mm] "SOIC, 8-Leads, Body 5x4mm, Pitch 1.27mm, IPC Low Density"
  rrect15% 1.65x0.65 smd: 1(-2.825,1.905) 2(-2.825,0.635) 3(-2.825,-0.635) 4(-2.825,-1.905) 5(2.825,-1.905) 6(2.825,-0.635) 7(2.825,0.635) 8(2.825,1.905)
  silkscreen extent -2.95,-2.5 1.6,2.91, body extent -3,-2.45 3,2.45, height 1.63
DCY0004A_L [mm] "SOT223, 4-Leads, Body 6.7x3.7mm, Pitch 2.3mm, IPC High Density"
  rrect11% 1.45x0.9 smd: 1(-3.075,2.3) 2(-3.075,0) 3(-3.075,-2.3)
  rrect7% 1.45x3.15 smd: 4(3.075,0)
  silkscreen extent -3.2,-3.35 2.05,3.42, body extent -3.5,-3.25 3.5,3.25, height 1.62
DGK0008A_L [mm] "TSOP, 8-Leads, Body 3.1x3.1mm, Pitch 0.65mm, IPC High Density"
  rrect22% 1.15x0.45 smd: 1(-2.125,0.975) 2(-2.125,0.325) 3(-2.125,-0.325) 4(-2.125,-0.975) 5(2.125,-0.975) 6(2.125,-0.325) 7(2.125,0.325) 8(2.125,0.975)
  silkscreen extent -2.25,-1.55 1.15,1.87, body extent -2.45,-1.5 2.45,1.5, height 0.94
FP-C0402-BB-MFG [mm]
  rect 0.52x0.52 smd paste+0 mask+0: 1(-0.4,0) 2(0.4,0)
  silkscreen extent -0.5,-0.64 0.5,0.64, body extent -0.8,-0.4 0.8,0.4, height 0.25
FP-C1206C-EB-MFG [mm]
  rect 0.95x1.7 smd paste+0 mask+0: 1(-1.4,0) 2(1.4,0)
  silkscreen extent -0.55,-0.9 0.55,0.9, body extent -1.6,-0.8 1.6,0.8, height 0.88
FP-CGA5L-0_3-0_1-MFG [mm]
  rect 1.1x1.35 smd paste+0 mask+0: 1(-1.65,0) 2(1.65,0)
  silkscreen extent -0.72,-0.95 0.72,0.95, body extent -2.3,-1.05 2.3,1.05, height 0.25
FP-CRCW0805-e3-MFG [mm]
  rect 0.95x1.45 smd paste+0 mask+0: 1(-0.975,0) 2(0.975,0)
  silkscreen extent -0.13,-0.7 0.13,0.7, body extent -1.55,-0.82 1.55,0.82, height 0.25
FP-D0008A-MFG [mm]
  rrect17% 1.55x0.6 smd paste+0 mask+0: 1(-2.7,1.905) 2(-2.7,0.635) 3(-2.7,-0.635) 4(-2.7,-1.905) 5(2.7,-1.905) 6(2.7,-0.635) 7(2.7,0.635) 8(2.7,1.905)
  silkscreen extent -4.21,-2.5 1.55,2.5, body extent -3.57,-2.75 3.57,2.75, height 0.25
LSF_SMT_3_5_135_04 [mm] "OMNIMATE Signal - Serie LSF  LSF-SMT 3.50/04/135 1.5"
  round 1.7 hole 1.1: A1(-5.25,1.75) A1(-5.25,-3.25) A2(-1.75,1.75) A2(-1.75,-3.25) A3(1.75,1.75) A3(1.75,-3.25) A4(5.25,1.75) A4(5.25,-3.25)
  silkscreen extent -7.35,-6.35 7.35,6.35, body extent -7.35,-6.35 7.35,6.35, height 13.17
LT-MSE-12-EDP_M [mm] "SOP, 12-Leads, Body 4.1x3.1mm, Pitch 0.65mm, Thermal Pad 2.95x1.76mm, IPC Low Density"
  oval 1.9x0.45 smd: 1(-2.2,1.625) 2(-2.2,0.975) 3(-2.2,0.325) 4(-2.2,-0.325) 5(-2.2,-0.975) 6(-2.2,-1.625) 7(2.2,-1.625) 8(2.2,-0.975) 9(2.2,-0.325) 10(2.2,0.325) 11(2.2,0.975) 12(2.2,1.625)
  rect 1.76x2.95 smd: 13(0,0)
  silkscreen extent -2.32,-2.05 0.85,2.52, body extent -1.55,-2.05 1.55,2.05, height 1.1
MOLX-731000114_V [mm] "Connector, 5-Leads, Body 14.8x6.35mm, Pitch 2.54mm"
  rect 2.05x2.05 hole 1.54: 1(0,0)
  round 2.05 hole 1.54: 2(-2.54,2.54) 3(-2.54,-2.54) 4(2.54,-2.54) 5(2.54,2.54)
  silkscreen extent -1.26,-3.17 3.17,3.17, body extent -11.62,-3.17 3.18,3.18, height 9.57
RESC1005X40X25LL05T10 [mm] "Chip Resistor, 2-Leads, Body 1.00x0.50mm, IPC High Density"
  rect 0.5x0.45 smd: 1(-0.375,0) 2(0.375,0)
  body extent -0.53,-0.27 0.53,0.28, height 0.4
RESC1609X50X30LL10T20 [mm] "Chip Resistor, 2-Leads, Body 1.55x0.85mm, IPC High Density"
  rect 0.7x0.85 smd: 1(-0.575,0) 2(0.575,0)
  body extent -0.82,-0.48 0.82,0.48, height 0.5
RESC1609X50X30NL8T20 [mm] "Chip Resistor, 2-Leads, Body 1.65x0.95mm, IPC Medium Density"
  rect 0.8x0.95 smd: 1(-0.65,0) 2(0.65,0)
  body extent -0.82,-0.48 0.82,0.48, height 0.5
RESC1609X50X30NL10T20 [mm] "Chip Resistor, 2-Leads, Body 1.55x0.85mm, IPC Medium Density"
  rect 0.8x0.95 smd: 1(-0.625,0) 2(0.625,0)
  body extent -0.82,-0.48 0.82,0.48, height 0.5
RESC2013X50X30ML20T20 [mm] "Chip Resistor, 2-Leads, Body 2.00x1.25mm, IPC Low Density"
  rect 1.25x1.55 smd: 1(-1.025,0) 2(1.025,0)
  silkscreen extent -0.1,-0.67 0.1,0.67, body extent -1.1,-0.72 1.1,0.72, height 0.5
RESC2013X50X30NL20T20 [mm] "Chip Resistor, 2-Leads, Body 2.00x1.25mm, IPC Medium Density"
  rect 1.05x1.45 smd: 1(-0.925,0) 2(0.925,0)
  silkscreen extent -0.1,-0.63 0.1,0.63, body extent -1.1,-0.72 1.1,0.72, height 0.5
RESC2013X60X40ML20T25 [mm] "Chip Resistor, 2-Leads, Body 2.00x1.25mm, IPC Low Density"
  rect 1.4x1.55 smd: 1(-0.95,0) 2(0.95,0)
  body extent -1.1,-0.72 1.1,0.72, height 0.6
RU-28_L [mm] "TSOP, 28-Leads, Body 9.7x4.4mm, Pitch 0.65mm, IPC High Density"
  oval 1.4x0.35 smd: 1(-2.8,4.225) 2(-2.8,3.575) 3(-2.8,2.925) 4(-2.8,2.275) 5(-2.8,1.625) 6(-2.8,0.975) 7(-2.8,0.325) 8(-2.8,-0.325) 9(-2.8,-0.975) 10(-2.8,-1.625) 11(-2.8,-2.275) 12(-2.8,-2.925) 13(-2.8,-3.575) 14(-2.8,-4.225) 15(2.8,-4.225) 16(2.8,-3.575) 17(2.8,-2.925) 18(2.8,-2.275) 19(2.8,-1.625) 20(2.8,-0.975) 21(2.8,-0.325) 22(2.8,0.325) 23(2.8,0.975) 24(2.8,1.625) 25(2.8,2.275) 26(2.8,2.925) 27(2.8,3.575) 28(2.8,4.225)
  silkscreen extent -2.92,-4.9 1.7,5.07, body extent -2.25,-4.9 2.25,4.9, height 1.2
SLAB-TSSOP-16_M [mm] "SOP, 16-Leads, Body 5.1x4.5mm, Pitch 0.65mm, IPC Low Density"
  oval 1.85x0.35 smd: 1(-2.925,2.275) 2(-2.925,1.625) 3(-2.925,0.975) 4(-2.925,0.325) 5(-2.925,-0.325) 6(-2.925,-0.975) 7(-2.925,-1.625) 8(-2.925,-2.275) 9(2.925,-2.275) 10(2.925,-1.625) 11(2.925,-0.975) 12(2.925,-0.325) 13(2.925,0.325) 14(2.925,0.975) 15(2.925,1.625) 16(2.925,2.275)
  silkscreen extent -3.05,-2.55 1.6,3.13, body extent -2.25,-2.55 2.25,2.55, height 1.2
TO-263_N [mm] "D2-PAK, 4-Leads, Body 9.2x10.2mm, Pitch 2.54mm, Lead Span 15.4mm, IPC Medium Density"
  rect 3.8x1 smd: 1(-6.3,2.54) 3(-6.3,-2.54)
  rect 9.3x10.4 smd: 4(3.55,0)
  silkscreen extent -6.42,-5.2 -1.5,5.2, body extent -2.95,-5.2 6.4,5.2, height 4.6

## Part data
C1 C2 C8 C9 C10 C11 C12 C13 C15 C30 C32: library part CMP-2007-03716-1, Manufacturer=Kemet, Part Number=C0805X105K3RACTU
C3 C4 C5: library part CMP-03020-000180-1, "CAP CER 0.1UF 25V 5% NP0 1206", Capacitance="0.10 μF", Manufacturer=KEMET, Package=C1206C-EB, Temperature="-55°C to +150°C", Temperature Characteristic=C0G, Temperature Coefficient=15%, Temperature Range High=+150°C, Temperature Range Low=-55°C, Tolerance=0.05, Voltage Rating="25 V", Automotive=Yes, Automotive Grade="Grade 0", Category=Cap, ComponentLink2Description=Datasheet, ComponentLink2URL=https://content.kemet.com/datasheets/KEM_C1007_X8R_ULTRA_150C_SMD.pdf, Device Class L1="Passive Components", Device Class L2=Capacitors, Device Class L3="Ceramic Capacitors", Digikey Description="CAP CER 0.1UF 25V 5% NP0 1206", Height=0.88mm, Ipc Land Pattern Name=CAPC320160X78, Lead Free=Yes, Manufacturer Part Number=C1206C104J3GACTU, Material=Ceramic, Mouser Description="Multilayer Ceramic Capacitors MLCC - SMD/SMT 25volts 0.1uF 5% C0G", Octopart=https://octopart.com/c1206c104j3gactu-kemet-9145095, RoHS=TRUE
C6 C7: library part CMP-2100-03601-1, "Chip Capacitor, 100 nF, +/- 10%, 50 V, -55 to 125 degC, 0603 (1608 Metric), RoHS, Tape and Reel", Capacitance=100nF, Case Code (Imperial)=0603, Case Code (Metric)=1608, Dielectric=X7R, Dielectric Material=Ceramic, Manufacturer=Yageo, Max Operating Temperature=125degC, Min Operating Temperature=-55degC, Package Description="2-Pin Surface Mount Device, Body 1.6 x 0.8 mm", Package Quantity=1, Tolerance=10%, Voltage=50V, Case/Package=0603, Datasheet URL=http://www.yageo.com/documents/recent/UPY-GPHC_X7R_6.3V-to-50V_15.pdf, Datasheet Version="Rev. 15, 10/2016", Depth=0.8mm, Height=0.8mm, Lead Free=LeadFree, Length=1.6mm, Manufacturer URL=http://www.yageo.com/, Number of Pins=2, Package Reference=0603, Packaging=TapeandReel, Radiation Hardening=No, REACH SVHC=NoSVHC, RoHSCompliant=True, Termination=SMD/SMT, Thickness=0.035inch, Voltage Rating=50V, Width=0.031inch
C14 C16 C17 C18 C19 C21 C22 C33: library part CMP-2008-02046-2, "CAP CER 0.1UF 10V X5R 0402", Capacitance="0.10 μF", Manufacturer=Kemet, Package=C0402-BB, Temperature="-55°C to +125°C", Temperature Characteristic=X5R, Temperature Coefficient=15%, Temperature Range High=+125°C, Temperature Range Low=-55°C, Tolerance=0.1, Voltage Rating="10 V", Automotive=No, Category=Cap, ComponentLink2Description=Datasheet, ComponentLink2URL=https://content.kemet.com/datasheets/KEM_C1002_X7R_SMD.pdf, Device Class L1="Passive Components", Device Class L2=Capacitors, Device Class L3="Ceramic Capacitors", Digikey Description="CAP CER 0.1UF 10V X5R 0402", Height=0.55mm, Ipc Land Pattern Name=CAPC10050X50, Lead Free=Yes, Manufacturer Part Number=C0402C104K8PACTU, Material=Ceramic, Mouser Description="Capacitor 100 nF 10 VDC 0402", Octopart=https://octopart.com/c0402c104k8pactu-kemet-140039, RoHS=TRUE
C23 C24 C25 C26 C27 C28 C35 C36: library part CMP-2007-00279-1, Manufacturer=Kemet, Part Number=C0805C104K5RACTU
C29 C31: library part CMP-08246-002126-1, "Cap Ceramic 10uF 25V X7R 10% Pad SMD 1206 +125°C Automotive T/R", Capacitance=10uF, Case Code (Imperial)=1206, Case Code (Metric)=3216, Dielectric=X7R, Max Operating Temperature=125°C, Min Operating Temperature=-55°C, Package Quantity=1, Ratings=AEC-Q200, Tolerance=10%, Voltage Rating=25V, Case/Package=1206, Composition=Ceramic, Depth=1.6mm, Height=1.6mm, Lead Free="Lead Free", Length=3.2mm, Mount="Surface Mount", Packaging="Tape and Reel", REACH SVHC="No SVHC", Termination=SMD/SMT, Thickness=0.075inch, Voltage Rating (DC)=25V, Weight=0.000571oz, Width=0.063inch
E1: library part CMP-1559-02099-1, "OMNIMATE Signal - series LSF", Colour=Black, Manufacturer=Weidmueller, Rated_current_min_no_of_poles_TU_20_deg_C="19 A", Rated_current_use_group_B_UL_1059="12 A", Rated_voltage_for_surge_voltage_class_pollution_degree_II_2="320 V", Rated_voltage_use_group_B_UL_1059="300 V", UL_94_flammability_rating=V-0, ComponentLink1Description="Manufacturer URL", ComponentLink1URL=http://www.weidmueller.com/, ComponentLink2Description="URL Link1", ComponentLink2URL=http://catalog.weidmueller.com/catalog/Start.do?localeId=en&ObjectID=1885200000, Contact_material=Cu-Leg, Contact_surface=tinned, Insulating_material="LCP GF", Mounting_onto_the_PCB="Reflow solder connection", No_of_poles=4, PackageReference=LSF_SMT_3_5_135_04, Packaging=Tube, PartNumber=1885200000, Pitch_inch="0,138 inch", Pitch_mm="3,5 mm", Qty="37 PCS", Revision=V1, Short_text_for_material="LSF-SMT 3.50/04/135 1.5SN BK TU", Side_termination_characteristic="closed side", Solder_pin_length_mm="1,5 mm", Solid_max_H05_07_V_U="1,5 mm²", Solid_min_H05_07_V_U="0,2 mm²", Wire_cross_section_AWG_max_UL_1059="AWG 16", Wire_cross_section_AWG_min_UL_1059="AWG 24"
J1 J2: library part CMP-2000-05487-1, "SMA Right-Angle PCB Jack Receptacle, Brass Body, Gold Plated, 50 Ohm, 5-Pin THD, RoHS, Tray", Manufacturer=Molex, Package Description="5-Pin Through Hole Device, Body 14.8 x 6.35 mm, Pitch 2.54 mm", Package Reference=731000114, Datasheet URL=http://www.molex.com/webdocs/datasheets/pdf/en-us/0731000114_RF_COAX_CONNECTORS.pdf, Datasheet Version=09/2016, Manufacturer URL=http://www.molex.com/, Mounting Technology=ThroughHole, Package URL=http://www.molex.com/pdm_docs/sd/731000114_sd.pdf
R1 R12 R33: library part CMP-02407-008264-1, "RES Thick Film, 30kΩ, 1%, 0.125W, 100ppm/°C, 0805", Case Code (Imperial)=0805, Case Code (Metric)=2012, Max Operating Temperature=155°C, Max Power Dissipation=125mW, Min Operating Temperature=-55°C, Package Quantity=10, Resistance=30kR, Temperature Coefficient=100ppm/°C, Tolerance=1%, Voltage Rating=150V, Case/Package=0805, Composition="Thick Film", Contact Plating=Tin, Depth=1.25mm, Features="Automotive AEC-Q200", Height=0.45mm, Lead Free="Lead Free", Length=2mm, Military Standard=Not, Mount="Surface Mount", Number of Pins=2, Number of Terminations=2, Packaging="Tape and Reel", Power Rating=125mW, Radiation Hardening=No, Termination=SMD/SMT, Voltage Rating (DC)=150V, Weight=0.000194oz, Width=0.049inch
R2 R14 R34: library part CMP-2001-04908-1, Manufacturer="Vishay Dale", Part Number=CRCW080510K0FKEA
R3 R9: library part CMP-2000-03068-1, Manufacturer="Vishay Dale", Part Number=CRCW060320K0FKEA
R4 R6: library part CMP-1666-00005-4, "Chip Resistor, 10 KOhm, +/- 1%, 100 mW, -55 to 155 degC, 0603 (1608 Metric), RoHS, Tape and Reel", Manufacturer="Vishay Semiconductor", Max Operating Temperature="155 degC", Min Operating Temperature="-55 degC", Package Quantity=5000, Voltage Rating="75 V", ComponentLink1Description="Manufacturer URL", ComponentLink1URL=http://www.vishay.com/, ComponentLink2Description=Datasheet, ComponentLink2URL=https://datasheet.ciiva.com/11809/0900766b80d98afc-11809037.pdf, DatasheetVersion=06/2012, Height="0.45 mm", Length="1.55 mm", Mounting Technology="Surface Mount", PackageDescription="2-Pin Surface Mount Device, Body 1.575 x 0.85 mm", PackageReference=0603, Packaging="Tape and Reel", REACH SVHC=Unknown, RoHSCompliant=true
R5: library part CMP-2001-00609-1, Manufacturer=Panasonic, Part Number=ERA6AEB202V
R7 R8: library part CMP-2000-03436-1, Manufacturer="Vishay Dale", Resistance=50, Part Number=CRCW060350R0FKEA
R10 R13: library part CMP-2001-03588-1, Manufacturer="Vishay Dale", Part Number=CRCW080518K0FKEA
R11 R15: library part CMP-2001-04924-1, Manufacturer="Vishay Dale", Part Number=CRCW080511K0FKEA
R16 R17 R18 R19 R24: library part CMP-2002-07170-1, Manufacturer="Yageo / Phycomp", Part Number=RC0402FR-07127RL
R20 R21 R22 R23 R25: library part CMP-2002-07819-1, Manufacturer="Yageo / Phycomp", Part Number=RC0402FR-0782R5L
R26 R27: library part CMP-2001-04933-1, Manufacturer="Vishay Dale", Part Number=CRCW0805127RFKEA
R28 R29: library part CMP-2001-04138-1, Manufacturer="Vishay Dale", Part Number=CRCW080582R5FKEA
R30 R31 R32: library part CMP-2001-03760-1, Manufacturer="Vishay Dale", Part Number=CRCW08052K20FKEA
U1: library part CMP-0783-00019-1, "Ultrafast SiGe Voltage Comparator, + / - 5 V, 180 ps Delay, Industrial, 16-pin QFN (CP-16-3), Reel", Manufacturer="Analog Devices", Voltage Supply (V)="5 to -5", Code_JEDEC=MO-220-VEED-2, ComponentLink1Description="Manufacturer URL", ComponentLink1URL=http://www.analog.com/en/index.html, ComponentLink2Description=Datasheet, ComponentLink2URL=http://www.analog.com/static/imported-files/data_sheets/ADCMP580_581_582.pdf, ComponentLink3Description="Package Specification", ComponentLink3URL=http://www.analog.com/static/imported-files/packages/PKG_PDF/LFCSP(CP)/CP_16_3.pdf, ComponentLink4Description="URL Link1", ComponentLink4URL="Product URL:http://www.analog.com/en/special-linear-functions/comparators/adcmp582/products/product.html", DatasheetVersion="Rev. A", Input Range (V)="-2 to 3", Mounting Technology="Surface Mount", PackageDescription="16-Pin Lead Frame Chip Scale Package, Body 3 x 3 mm, Pitch 0.5 mm", PackageReference=CP-16-3, Packing=Reel, PartNumber=ADCMP582BCPZ-R2
U2 U7 U8 U9: library part CMP-0244-00094-1, "1.5A, 1.2V to 37V Adjustable Voltage Regulator, 3-Pin D2PAK, Tape and Reel", ComponentLink1Description="Manufacturer URL", ComponentLink1URL=http://www.st.com, ComponentLink2Description=Datasheet, ComponentLink2URL=http://www.st.com/internet/com/TECHNICAL_RESOURCES/TECHNICAL_LITERATURE/DATASHEET/CD00000455.pdf, DatasheetVersion=1/11/2011, PackageDescription="3-Pin Transistor Outline Package 2.54 mm Pitch, 15.4 mm Lead Span (D2PAK)", PackageReference=TO-263, PackageVersion=2011
U3: library part CMP-04895-000042-1, "36V ZERO DRIFT OP-AMP", Ambient Temperature Range High=+125°C, Ambient Temperature Range Low=-40°C, Input Bias Current=0.00007uA, Input Offset Voltage=0.0004mV, Manufacturer="Texas Instruments", Max Dual Supply Voltage=18V, Max Junction Temp=+150°C, Max Supply Voltage=36V, Min Dual Supply Voltage=2.25V, Min Supply Voltage=4.5V, Nominal Supply Current=1.3mA, Output Current Per Channel=65mA, Package=D0008A, Temperature="-40°C to +125°C", Voltage Gain=170dB, Automotive=No, Category=IC, ComponentLink2Description=Datasheet, ComponentLink2URL=http://www.ti.com/lit/ds/symlink/opa189.pdf, Device Class L1="Integrated Circuits (ICs)", Device Class L2="Linear ICs", Device Class L3="Amplifiers - Op Amps", Digikey Description="36V ZERO DRIFT OP-AMP", Gain Bandwidth=14MHz, Height=1.75mm, Ipc Land Pattern Name=SOIC127P600X175-8, Lead Free=Yes, Manufacturer Part Number=OPA189IDR, Mouser Description="Op Amp Single Zero Drift Amplifier R-R O/P ±18V/36V 8-Pin SOIC T/R", Number Of Channels=1, Octopart=https://octopart.com/opa189idr-texas+instruments-84619764, RoHS=TRUE, Standoff Height=0.11mm, Temperature Range High=+125°C, Temperature Range Low=-40°C
U4: library part CMP-0318-01862-2, "Single 12-Bit TxDAC, 125 Msps, -40 to +85 degC, RU-28, Pb-Free, Tube", Generic Part Number=AD9762, Manufacturer="Analog Devices", # DAC Outputs=1, Code_JEDEC=MO-153-AE, ComponentLink1Description="Manufacturer URL", ComponentLink1URL=http://www.analog.com/en/index.html, ComponentLink2Description=Datasheet, ComponentLink2URL=http://www.analog.com/static/imported-files/data_sheets/AD9762.pdf, ComponentLink3Description="Package Specification", ComponentLink3URL=http://www.analog.com/static/imported-files/packages/249854663RU_28.pdf, ComponentLink4Description="Product URL", ComponentLink4URL=http://www.analog.com/en/digital-to-analog-converters/da-converters/ad9762/products/product.html, DatasheetVersion=Rev.B, Max V+=5.5V, Mounting Technology="Surface Mount", Op Pwr Diss=160mW, PackageDescription="28-Lead Thin Shrink Small Outline Package [TSSOP]", PackageReference=RU-28, PackageVersion=2005, Packing=Tube, PartNumber=AD9762ARUZ, Resolution (Bits)=12, RevisionNote="Component URL fixed", RoHS=Y, Settling Time=35ns, Single Supply=Yes
U5: library part CMP-0327-00168-3, "600 Mbps 3.3 V ECL Differential Receiver with LVPECL, LVDS Input and LVTTL, CMOS Output, 2 Tx and 2 Rx, -40 to +85 degC, 8-pin VSSOP (DGK), Green (RoHS & no Sb/Br)", Manufacturer="Texas Instruments", ComponentLink1Description="Manufacturer URL", ComponentLink1URL=http://www.ti.com/, ComponentLink2Description=Datasheet, ComponentLink2URL=http://www.ti.com/general/docs/lit/getliterature.tsp?genericPartNumber=SN65EPT23&fileType=pdf, ComponentLink3Description="URL Link1", ComponentLink3URL=SamplesURL:http://www.ti.com/product/sn65ept23#samples, DatasheetVersion=SLLS969A, Eco-Plan="Green (RoHS & no Sb/Br)", ICC(Max)(mA)=25, Input Signal="LVPECL, LVDS", Mounting Technology="Surface Mount", No. of Rx=2, No. of Tx=2, Output Signal="LVTTL, CMOS", PackageDescription="8-Pin Thin Small Outline Package 3 x 3 mm Body ,0.65 mm Pitch", PackageReference=DGK0008A, PackageVersion="revE, May-2006", PartNumber=SN65EPT23DGKR, Signaling Rate(Mbps)=600, SubFamily="PECL PHY", xECL=TRUE
U6: library part CMP-0510-00562-1, "1:8 Low Jitter CMOS Clock Buffer with 2:1 Input Mux, 1 to 200 MHz, -40 to 85 degC, 16-pin SOP", Frequency (MHz)="1 to 200", Manufacturer="Silicon Labs", Code_IPC=J-STD-020C, Code_JEDEC=MO-153, ComponentLink1Description="Manufacturer URL", ComponentLink1URL=http://www.silabs.com/, ComponentLink2Description=Datasheet, ComponentLink2URL=http://www.silabs.com/Support%20Documents/TechnicalDocs/Si53360.pdf, ComponentLink3Description="Package Specification", ComponentLink3URL=http://www.silabs.com/Support%20Documents/TechnicalDocs/Si53360.pdf, DatasheetVersion="Rev. 0.4", Mounting Technology="Surface Mount", Output Format=LVCMOS, PackageDescription="16-Pin Thin Shrink Small-Outline Package, Body 5 x 4.4 mm, Pitch 0.65 mm", PackageReference=TSSOP-16, PartNumber=Si53360-B-GT, Sub-Family="Clock Buffers"
U10: library part SY89296U
U11: library part CMP-0327-00041-3, "4000 Mbps 3.3 V Dual LVTTL / LVCMOS to Differential LVPECL Buffer, 2 Tx and 2 Rx, -40 to +85 degC, 8-pin SOIC (D), Green (RoHS & no Sb/Br)", Manufacturer="Texas Instruments", ComponentLink1Description="Manufacturer URL", ComponentLink1URL=http://www.ti.com/, ComponentLink2Description=Datasheet, ComponentLink2URL=http://www.ti.com/general/docs/lit/getliterature.tsp?genericPartNumber=SN65EPT22&fileType=pdf, ComponentLink3Description="URL Link1", ComponentLink3URL=SamplesURL:http://www.ti.com/product/sn65ept22#samples, DatasheetVersion=SLLS926A, Eco-Plan="Green (RoHS & no Sb/Br)", ICC(Max)(mA)=50, Input Signal="LVTTL, CMOS", Mounting Technology="Surface Mount", No. of Rx=2, No. of Tx=2, Output Signal=LVPECL, PackageDescription="8-Pin Plastic Small Outline Integrated Circuit, 4.9 x 3.9 mm, Pitch 1.27 mm Pitch", PackageReference=D0008A, PackageVersion="revM, Jun-2011", PartNumber=SN65EPT22D, Signaling Rate(Mbps)=4000, SubFamily="PECL PHY", xECL=TRUE
U12: library part CMP-0475-00250-1, "High Voltage, Low Quiescent Current Inverting Charge Pump, 4.5 to 32 V Vin, 12-pin SOP (MSE-12-EDP), -40 to 125 degC, Pb-Free", Frequency(kHz)=500, Manufacturer="Linear Technology", ComponentLink1Description="Manufacturer URL", ComponentLink1URL=http://www.linear.com/, ComponentLink2Description=Datasheet, ComponentLink2URL=http://cds.linear.com/docs/en/datasheet/3261fb.pdf, ComponentLink3Description="Package Specification", ComponentLink3URL=http://cds.linear.com/docs/en/packaging/05081666_G_MSE12.pdf, DatasheetVersion="Rev. B", Ishutdown(uA)=2, Isupply(mA)=0.06, Max Iout(mA)=100, Mounting Technology="Surface Mount", PackageDescription="12-Pin Plastic MSOP, Exposed Die Pad, Body 4.039 x 3 mm, Pitch 0.65 mm", PackageReference=MSE-12-EDP, PackageVersion="Rev. G, 05/2013", PartNumber=LTC3261IMSE#PBF, RoHS=TRUE, Vin Max(V)=32, Vin Min(V)=4.5, Voutput=-Vin
U13: library part CMP-0062-01832-3, "3-Terminal Adjustable Negative Regulator, 4-pin SOT-223, Pb-Free", Manufacturer="Texas Instruments", PackageTopMarking=XYTT*N02A, PowerWise=N, Code_IPC=SOT223-4, Code_JEDEC=TO-261-AA, ComponentLink1Description="Datasheet URL", ComponentLink1URL=http://www.ti.com/general/docs/lit/getliterature.tsp?genericPartNumber=LM337-N&fileType=pdf, CompType="LDO IC", PackageDescription="Molded SOT-223, 6.50 x 3.56 x 1.6mm Body, 4 Lead, 2.3mm Pitch", PackageReference=DCY0004A, PinCount=4, RoHS=Y

## Via types
v1: diameter 0.406, hole 0.254, Top Layer to Bottom Layer 6, 278 vias
v2: diameter 1.27, hole 0.711, Top Layer to Bottom Layer 6, 62 vias
v3: diameter 0.711, hole 0.381, Top Layer to Bottom Layer 6, 50 vias
v4: diameter 0.6, hole 0.6, Top Layer to Bottom Layer 6, 16 vias
v5: diameter 0.5, hole 0.2, Top Layer to Bottom Layer 6, 7 vias
v6: diameter 3.4, hole 3.4, Top Layer to Bottom Layer 6, 4 vias

## Nets (pads, with @x,y where several pads share a name; then routed paths per layer and width w, separated by ;. In a path a pad name is that pad's centre, name@x,y a point inside that pad or via, vN(x,y) a via of type N, cw(c..) or ccw(c..) an arc to the next point about the centre after c; other vN are vias at no path point)
+3V3_AN: C5.1 C7.2 C9.2 R10.2 U4.24 U7.4 | length 26.1
  Top Layer w0.508: C9.2@119.9,150.9 119.9,143.807 U7.4@119.06,142.967 121.675,140.351 R10.2@121.675,135
  Bottom Layer 6 w0.254: v3(145.8,153) 147.375,153 C7.2@147.4,152.975 147.4,153.8 149.375,155.775 U4.24@149.375,157.2 ; v3(151.4,149.8) 151.487,149.887 151.487,150.462 152.225,151.2 C5.1@152.6,151.2
  other v2: 112,142 112,145 112,148
+3V3_D: AB1.7 AB1.13 AB1.19 AB1.25 AB1.26 AB1.32 AB1.38 AB1.44 BB1.7 BB1.13 BB1.19 BB1.25 BB1.26 BB1.32 BB1.38 BB1.44 CB1.7 CB1.13 CB1.19 CB1.25 CB1.26 CB1.32 CB1.38 CB1.44 DB1.7 DB1.13 DB1.19 DB1.25 DB1.26 DB1.32 DB1.38 DB1.44 | length 102.4
  Bottom Layer 6 w0.254: v3(140.5,201.3) AB1.26@140.5,203.3 AB1.25@140.5,207.7 ; v3(143.5,201.3) AB1.32@143.5,203.3 AB1.19@143.5,207.7 ; v3(146.5,201.3) AB1.38@146.5,203.3 AB1.13@146.5,207.7 ; CB1.7@147.5,167.3 CB1.44@147.5,171.7 v3(147.5,173.7) ; v3(149.5,201.3) AB1.44@149.5,203.3 AB1.7@149.5,207.7 ; CB1.13@150.5,167.3 CB1.38@150.5,171.7 v3(150.5,173.7) ; CB1.19@153.5,167.3 CB1.32@153.5,171.7 v3(153.5,173.7) ; CB1.25@156.5,167.3 CB1.26@156.5,171.7 v3(156.5,173.7) ; DB1.26@166,167.3 DB1.25@166,171.7 v3(166,173.7) ; v3(166,201.3) BB1.26@166,203.3 BB1.25@166,207.7 ; DB1.32@169,167.3 DB1.19@169,171.7 v3(169,173.7) ; v3(169,201.3) BB1.32@169,203.3 BB1.19@169,207.7 ; DB1.38@172,167.3 DB1.13@172,171.7 v3(172,173.7) ; v3(172,201.3) BB1.38@172,203.3 BB1.13@172,207.7 ; DB1.44@175,167.3 DB1.7@175,171.7 v3(175,173.7) ; v3(175,201.3) BB1.44@175,203.3 BB1.7@175,207.7
+3V3_DI: C6.2 C13.2 C17.1 C18.1 C19.1 C23.2 C24.2 C25.2 C26.2 C27.2 C28.2 R13.2 R16.2 R17.2 R18.2 R19.2 R24.2 R26.2 R27.2 U1.9 U1.12 U4.27 U5.8 U6.2 U6.15 U9.4 U10.13 U10.18 U10.19 U10.22 U11.6 U11.8 | length 77.8
  Top Layer w0.203: v3(154.8,131.7) 154.897,131.603 154.897,131.203 C19.1@155.4,130.7 157.006,130.7 U5.8@157.025,130.681 ; v3(155.6,125.9) 155.61,125.89 155.61,125.24 155.802,125.048 155.802,125.023 155.925,124.9 R18.2@155.95,124.9 ; v3(156.5,119.2) 156.55,119.25 157.65,119.25 C17.1@157.7,119.3 157.7,118.763 158,118.463 U1.12@158,117.9 ; R19.2@158.485,124.9 v3(159.4,124.9) ; U1.9@159.5,117.9 159.5,118.463 159.891,118.854 159.891,119.291 C18.1@159.9,119.3 160.186,119.586 160.265,119.586 160.8,120.121 v1(160.8,121.8) ; R17.2@161.5,117.95 161.5,117.975 161.861,118.336 161.861,118.561 v1(161.9,118.6)
  Top Layer w0.254: v3(161.3,134) 161.325,134.025 162.275,134.025 R24.2@162.3,134.05 ; R16.2@161.498,115.548 161.571,115.474 161.571,114.929 v1(161.6,114.9) ; v3(170.283,143.304) 170.6,142.987 C26.2@170.6,141.6 170.614,141.614 171.873,141.614 171.988,141.5 U10.22@173.55,141.5
  Top Layer w0.305: v2(169,145.4) C27.2@170.9,145.4 170.975,145.4 171.675,144.7 U10.18@173.55,144.7 U10.19@173.55,143.9 ; v2(176.7,150.3) C28.2@178.2,150.3 U10.13@178.2,147.75 ; U11.6@178.165,126.475 178.165,127.665 178.7,128.2 180.178,128.2 180.8,127.579 180.8,126.57 U11.8@180.705,126.475 183.125,126.475 C24.2@183.2,126.4 183.264,126.336 v2(185.279,126.336) C25.2@185.279,122.996 ; v2(182.8,110.9) 182.8,112.7 C23.2@182.9,112.8 U6.15@182.9,116 ; U6.2@182.9,121.85 182.9,122.612 183.07,122.782 183.07,122.87 183.674,123.474 183.926,123.474 184.127,123.273 185.002,123.273 C25.2@185.279,122.996 ; C25.2@185.5,122.7 185.279,122.921 C25.2@185.279,122.996 ; v2(190.4,137.7) R26.2@190.4,139.275 ; R27.2@190.4,145.925 v2(190.4,147.6)
  Top Layer w0.508: C13.2@119,180.7 119,172.996 U9.4@118.471,172.467 120.175,170.763 R13.2@120.175,164.4
  Bottom Layer 6 w0.254: v3(145.3,157.1) 145.3,156.976 145.575,156.701 C6.2@145.575,155.2 146.5,155.2 147.425,156.125 U4.27@147.425,157.2
  other v2: 112,173 112,175 112,177